# Allegro board FLASHLIGHT_REVA2-2.brd
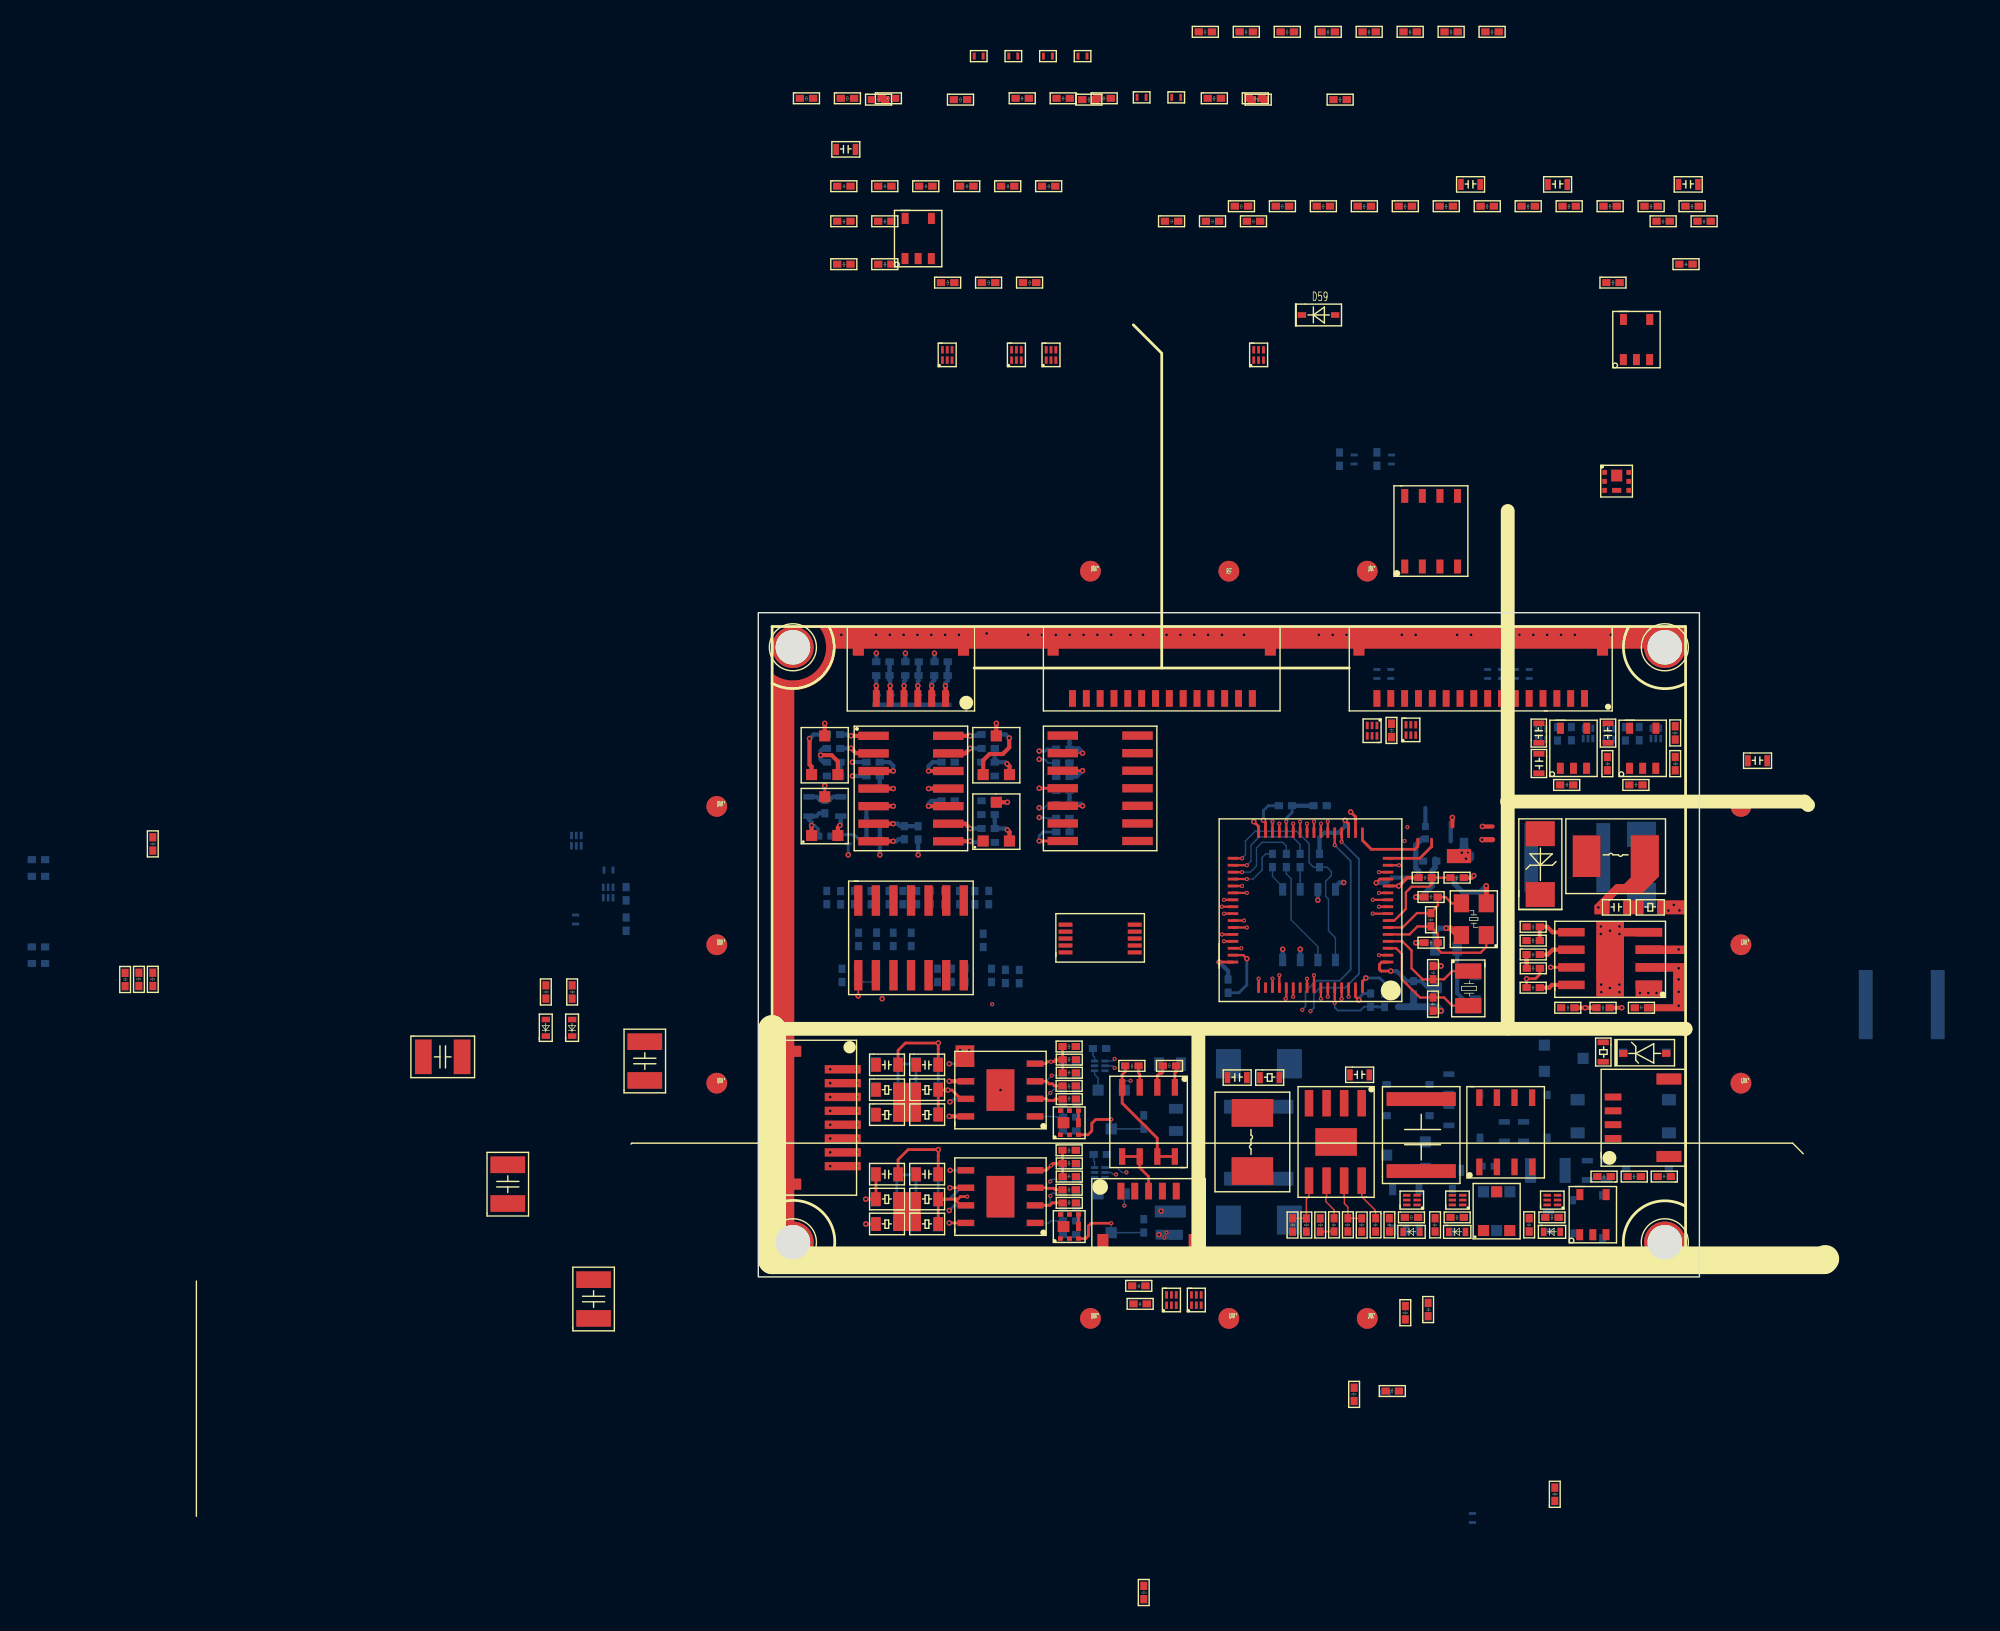
[diagram p0: board, top side]
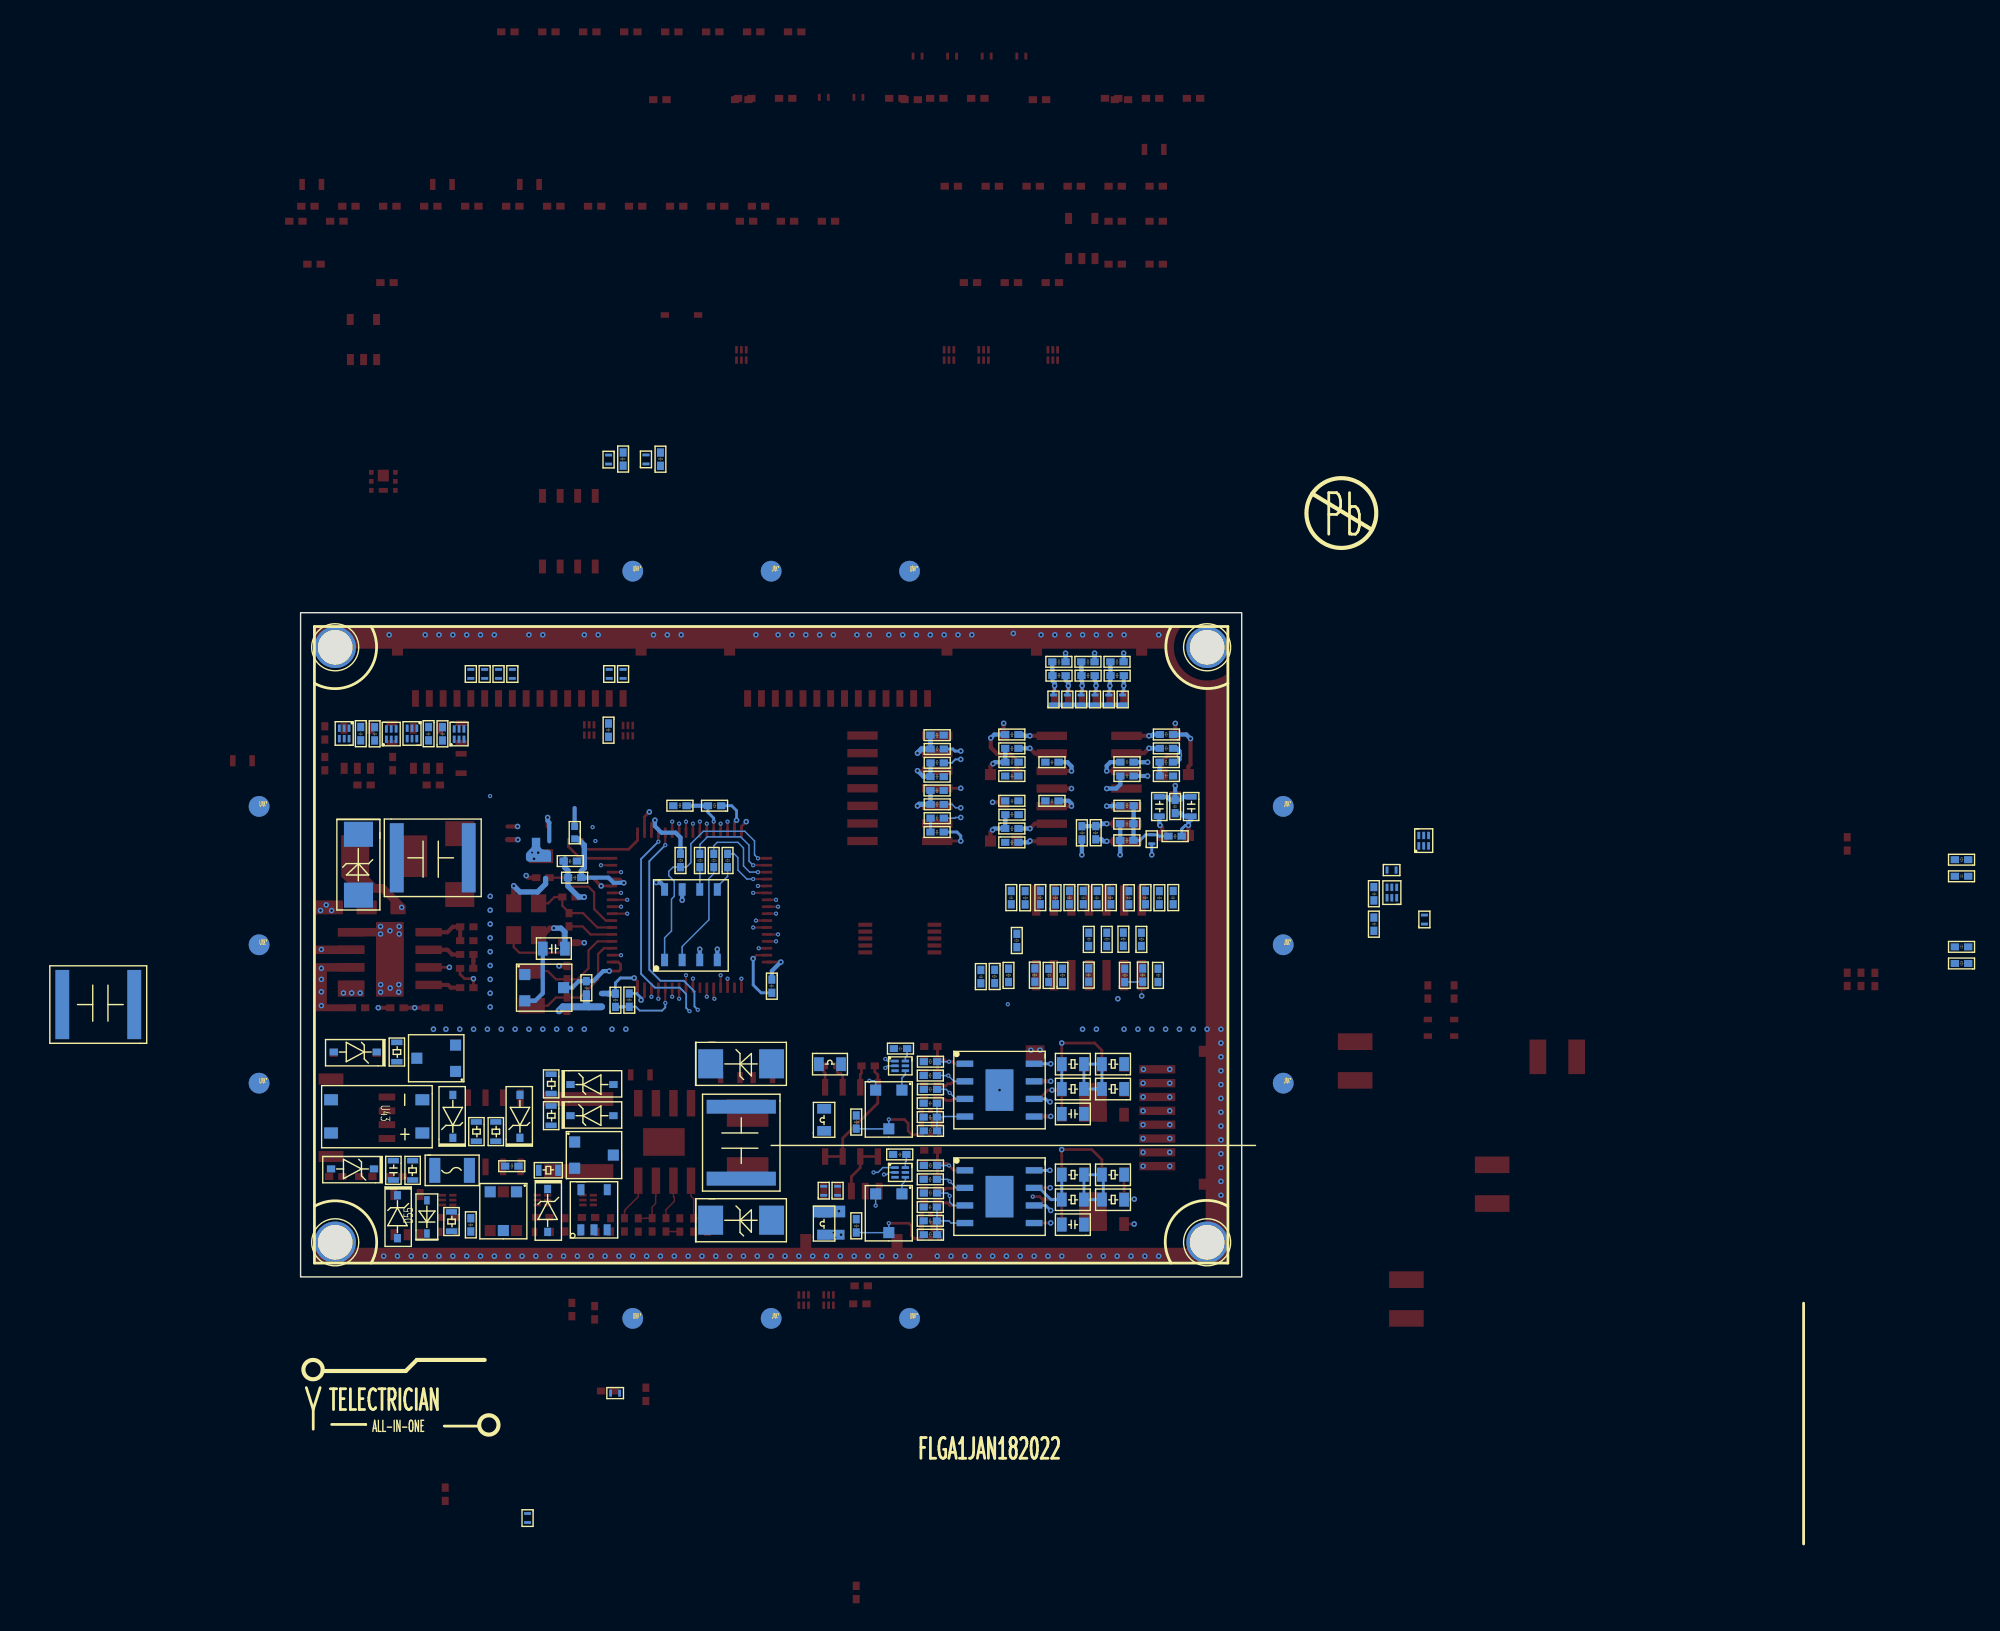
[diagram p1: board, bottom side, seen from below]

Outline 68 x 48 mm; copper layers: TOP, GND-2, SIGNAL-3, VCC-4, GND-5, SIGNAL-6, GND-7, BOTTOM. Coordinates in mm from the lower left corner of the outline.
Outline path: rectangle 0,0 68,48

## Design rules (mm)
constraint set DEFAULT: min track width 0.1

## Placement (name value [footprint] x y rotation side)
BT1  CR1220-3V  [C0805]  50.7 23.1 180 bottom
C5  0.1uF  [C0402]  7.8 36.45 0 bottom
C31  0.1uF  [C0402]  47.7 28.6 0 top
C32  22pF  [C0402]  49.1 27.7 180 top
C35  22pF  [C0402]  49.1 24.4 180 top
C36  22pF  [C0402]  49 21.5 90 top
C39  0.1uF  [C0402]  -45.5 21 90 top
C40  22pF  [C0402]  48.5 20.2 270 top
C44  0.1uF  [C0402]  22.96 15 180 top
C45  0.1uF  [C0402]  22.96 7.5 180 top
C46  10uF  [C1210]  -11.9 -3 90 top
C47  10uF  [C1210]  -8.2 14.2 90 top
C48  10uF  [C0805]  11.2 6.8 0 top
C55  10uF  [C0402]  17.1 35.95 180 bottom
C56  10uF  [C0402]  4.95 36.45 0 bottom
C57  0.1uF  [C0402]  57.5 38.76 90 bottom
C63  0.1uF  [C0402]  46 40 270 bottom
C64  0.1uF  [C0402]  59 39.74 270 bottom
C71  0.1uF  [C0402]  14.2 36.95 180 bottom
C75  0.1uF  [C0402]  63.9 39.74 270 bottom
C76  0.1uF  [C0402]  -9.8 27.2 90 bottom
C78  0.1uF  [C0402]  62.4 38.76 90 bottom
C80  0.1uF  [C0402]  -9.8 25 90 bottom
C81  10uF  [C0402]  49 29.8 180 bottom
C82  0.1uF  [C0402]  8.79 32.5 180 bottom
C84  0.1uF  [C0402]  48.69 28.6 180 bottom
C85  0.1uF  [C0402]  -52.5 29.2 0 bottom
C86  0.1uF  [C0402]  16.9 27.9 270 bottom
C87  0.1uF  [C0402]  11.7 27.9 270 bottom
C88  0.1uF  [C0402]  10.7 27.9 270 bottom
C89  0.1uF  [C0402]  5.2 27.9 270 bottom
C91  0.1uF  [C0402]  -52.5 24.1 0 bottom
C92  0.1uF  [C0402]  34.2 21.5 270 bottom
C93  0.1uF  [C0402]  47.1 20.41 90 bottom
C94  0.1uF  [C0402]  18.6 21.21 90 bottom
C95  0.1uF  [C0402]  11.3 22.3 270 bottom
C96  0.1uF  [C0402]  5.8 21.3 90 bottom
C98  0.1uF  [C0402]  46 39 90 top
C99  10uF  [C0805]  11.2 14.7 0 top
C102  10uF  [C1210]  -24.2 15.9 0 top
C103  10uF  [C1210]  -18.1 5.3 90 top
C104  0.1uF  [C0402]  13.7 21.3 90 bottom
C105  0.1uF  [C0402]  10.8 23.9 90 bottom
C107  1.5uF  [C0402]  65.95 7.5 180 top
C108  0.1uF  [C0402]  61.6 7.5 180 top
C109  0.1uF  [C0402]  45.35 4.25 270 top
C110  0.1uF  [C0402]  48.65 4.25 270 top
C111  0.1uF  [C0402]  48.65 -2.85 90 top
C112  0.1uF  [C0402]  55.45 4.25 270 top
C113  10uF  [C0603]  61.7 8.5 270 bottom
C114  0.1uF  [C0402]  64.3 19.7 180 top
C115  10nF  [C0603]  61.2 26.3 0 top
C116  47uF  [C2220]  80.02 19.68 0 bottom
C117  0.1uF  [C0402]  55.5 20.65 0 top
C118  5.6nF  [C0402]  55.5 23.05 0 top
C119  47uF  [C2220]  61.05 30.29 180 bottom
C120  4.7uF  [C0603]  50.66 78.55 0 top
C121  0.1uF  [C0402]  66.54 72.94 0 top
C122  10uF  [C0603]  66.39 78.55 0 top
C123  4.7uF  [C0603]  71.4 36.9 0 top
C124  0.1uF  [C0402]  63.9 35.8 180 top
C125  10uF  [C0603]  56.8 38.5 90 top
C126  10uF  [C0603]  5.53 81.08 0 top
C127  4.7uF  [C0603]  56.95 78.55 0 top
C128  0.1uF  [C0402]  5.69 76.04 0 top
C129  0.1uF  [C0402]  8.65 76.04 0 top
C130  10uF  [C0603]  61.8 38.5 90 top
C131  4.7uF  [C0603]  56 37.9 270 top
C132  0.1uF  [C0402]  58.9 35.8 180 top
C133  0.1uF  [C0402]  61.6 36.6 90 top
C134  0.1uF  [C0603]  42.65 14.2 0 top
C135  10nF  [C0603]  33.8 14 0 top
C136  47uF  [C2220]  47.9 7.65 90 top
C137  0.1uF  [C0402]  44.35 4.25 270 top
C138  47uF  [C2220]  36.16 12.3 270 bottom
C139  5.6nF  [C0402]  41.35 4.25 270 top
C140  10uF  [C0805]  11.2 12.4 0 bottom
C141  0.1uF  [C0402]  22.99 12.3 180 bottom
C142  10uF  [C0603]  4.06 34.79 270 bottom
C143  0.1uF  [C0402]  7.8 37.45 0 bottom
C147  10uF  [C0603]  6.36 34.79 270 bottom
C148  0.1uF  [C0402]  5.06 34.48 270 bottom
C149  10uF  [C0402]  17.1 34.15 180 bottom
C150  0.1uF  [C0402]  14.2 34.15 180 bottom
C153  0.1uF  [C0402]  29.37 76.04 0 top
C154  0.1uF  [C0402]  32.33 76.04 0 top
C155  0.1uF  [C0402]  35.29 76.04 0 top
C166  0.1uF  [C0402]  64.89 76.04 0 top
C167  0.1uF  [C0402]  67.85 76.04 0 top
C168  0.1uF  [C0402]  5.69 78.57 0 top
C169  0.1uF  [C0402]  8.65 78.57 0 top
C170  0.1uF  [C0402]  11.61 78.57 0 top
C171  0.1uF  [C0402]  14.57 78.57 0 top
C172  0.1uF  [C0402]  17.53 78.57 0 top
C173  0.1uF  [C0402]  20.49 78.57 0 top
C174  0.1uF  [C0402]  25.14 16.25 180 bottom
C175  0.1uF  [C0402]  25.2 8.6 180 bottom
C176  10uF  [C0805]  11.2 4.4 0 bottom
C177  0.1uF  [C0402]  22.99 4.8 180 bottom
C178  0.1uF  [C0402]  27 -0.9 0 top
C179  0.1uF  [C0402]  27.1 -2.2 0 top
C196  0.1uF  [C0402]  18.58 84.92 0 top
C197  0.1uF  [C0402]  21.54 84.92 0 top
C198  0.1uF  [C0402]  24.5 84.92 0 top
C199  10uF  [C0805]  8.3 6.8 0 top
C200  10uF  [C0805]  8.3 14.7 0 top
D10  BLUE  [LED0402]  -15.1 17.5 90 top
D11  BLUE  [LED0402]  -13.2 17.5 90 top
D15  ESD4.5V88D-C  [DFN-1006DN]  52.7 43.9 270 bottom
D21  ESD4.5V88D-C  [DFN-1006DN]  45.7 43.9 270 bottom
D22  ESD4.5V88D-C  [DFN-1006DN]  44.7 43.9 270 bottom
D23  ESD4.5V88D-C  [DFN-1006DN]  43.05 58.75 90 bottom
D24  ESD4.5V88D-C  [DFN-1006DN]  45.75 59.39 270 bottom
D25  ESD4.5V88D-C  [DFN-1006DN]  53.7 43.9 270 bottom
D26  ESD4.5V88D-C  [DFN-1006DN]  54.7 43.9 270 bottom
D28  ESD4.5V88D-C  [DFN-1006DN]  -10.5 29.4 180 bottom
D29  ESD4.5V88D-C  [DFN-1006DN]  55.7 43.9 270 bottom
D30  ESD4.5V88D-C  [DFN-1006DN]  -13.2 25.5 90 bottom
D32  ESD4.5V88D-C  [DFN-1006DN]  6.5 31.3 90 bottom
D34  ESD4.5V88D-C  [DFN-1006DN]  45.6 -8.4 180 bottom
D36  ESD4.5V88D-C  [DFN-1006DN]  51.6 -17.1 270 bottom
D38  BZT52C6V8  [SOD-123]  62.5 16.15 0 top
D41  BZT52C24  [SOD-123]  52.15 10.05 90 bottom
D42  BZT52C36V  [SOD-123]  57 10.05 90 bottom
D43  BZT52C4V7  [SOD-123]  50.15 6.35 270 bottom
D44  RED  [LED0402]  49.99 3 0 top
D45  BZT52C4V7  [SOD-123]  62.7 7.8 0 bottom
D49  BLUE  [LED0402]  46.7 3 0 top
D50  BZT52C24  [SOD-123]  48.5 11.65 180 bottom
D51  BZT52C4V7  [SOD-123]  48.5 13.9 180 bottom
D52  YELLOW  [LED0402]  56.84 3 0 top
D53  BZT52C4V7  [SOD-123]  62.5 16.25 0 bottom
D54  BZT52C4V7  [SOD-123]  61 5.9 270 bottom
D55  MBRX0560  [SOD-323]  58.2 2.9 90 bottom
D56  SS35  [DO-214AC]  65.22 32.11 270 bottom
D57  SS35  [DO-214AC]  38.5 14 180 bottom
D58  SMAJ6.0A  [DO-214AC]  57.9 27.5 90 top
D59  MBRX0560  [SOD-323]  39.04 68.84 0 top
D60  SMAJ13A  [DO-214AC]  38.5 2.7 180 bottom
D67  ESD4.5V88D-C  [DFN-1006DN]  15.6 88.22 0 top
D68  ESD4.5V88D-C  [DFN-1006DN]  18.1 88.22 0 top
D69  ESD4.5V88D-C  [DFN-1006DN]  20.6 88.22 0 top
D70  ESD4.5V88D-C  [DFN-1006DN]  23.1 88.22 0 top
D75  ESD4.5V88D-C  [DFN-1006DN]  29.2 5.9 90 bottom
D76  ESD4.5V88D-C  [DFN-1006DN]  30.2 5.9 90 bottom
D97  ESD4.5V88D-C  [DFN-1006DN]  27.37 85.24 0 top
D98  ESD4.5V88D-C  [DFN-1006DN]  29.87 85.24 0 top
D99  ESD4.5V88D-C  [DFN-1006DN]  8.6 41.4 90 bottom
D100  ESD4.5V88D-C  [DFN-1006DN]  9.6 41.4 90 bottom
D101  ESD4.5V88D-C  [DFN-1006DN]  11.6 41.4 90 bottom
D102  ESD4.5V88D-C  [DFN-1006DN]  10.6 41.4 90 bottom
D103  ESD4.5V88D-C  [DFN-1006DN]  13.6 41.4 90 bottom
D104  ESD4.5V88D-C  [DFN-1006DN]  12.6 41.4 90 bottom
F1  1AMP  [FUSE1206]  58.3 7.7 180 bottom
J2  Header1x16  [SMD-SH1D0-16P-HOR]  52.2 42.5 180 top
J5  Header1x4  [SMD-SH1D0-4P-HOR]  62.5 11.5 90 top
J7  Header1x6  [SMD-SH1D0-6P-HOR]  11.03 42.49 180 top
J10  Header1x8  [SMD-SH1D0-8P-HOR]  5.5 11.5 270 top
J12  Header1x5  [SMD-SH1D0-5P-HOR]  28.7 5.5 0 top
J13  Header1x14  [SMD-SH1D0-14P-HOR]  28.2 42.5 180 top
L4  BLM15BD182SN1D  [FB0402]  48.44 32.6 270 bottom
L6  10uH  [IND-5D7X5D2X1D8]  64.05 30.4 180 top
L7  10uH  [IND-5D7X5D2X1D8]  35.7 11.85 270 top
L8  1uH  [L0805]  29.55 10.35 90 bottom
L9  1uH  [L0805]  29.55 2.85 90 bottom
L10  1uH  [L0805]  30.75 14.75 180 bottom
NOREF  -  []  4.51 36.81 90 top
NOREF#2  -  []  23.43 5.66 90 top
NOREF#3  -  []  8.3 12.95 90 top
NOREF#4  -  []  51.05 29.66 90 top
NOREF#5  -  []  56 36.3 0 top
NOREF#6  -  []  21.55 6.44 0 top
NOREF#7  -  []  44.31 58.16 0 top
NOREF#8  -  []  11.2 8.05 0 top
NOREF#9  -  []  13.2 11.1 90 top
NOREF#10  -  []  10.17 44.06 90 top
NOREF#11  -  []  15.26 26.46 90 top
NOREF#12  -  []  53.61 76.98 90 top
NOREF#13  -  []  8.3 6.75 90 top
NOREF#14  -  []  47.1 38.69 90 top
NOREF#15  -  []  28.24 4.63 90 top
NOREF#16  -  []  21.53 12.46 90 top
NOREF#17  -  []  37.75 14 90 top
NOREF#18  -  []  55.99 38.5 90 top
NOREF#19  -  []  40.16 29.15 90 top
NOREF#20  -  []  51.43 28.46 90 top
NOREF#21  -  []  11.16 33.03 0 top
NOREF#22  -  []  21.07 31.76 90 top
NOREF#23  -  []  23.43 2.66 90 top
NOREF#24  -  []  58.75 6.1 0 top
NOREF#25  -  []  4.42 84.78 90 top
NOREF#26  -  []  26.65 -2.34 0 top
NOREF#27  -  []  12.74 71.46 0 top
NOREF#28  -  []  36.15 14.81 0 top
NOREF#29  -  []  10.6 73.59 90 top
NOREF#30  -  []  17.54 36.81 90 top
NOREF#31  -  []  15.26 28.34 0 top
NOREF#32  -  []  67.97 72.8 90 top
NOREF#33  -  []  67.04 6.72 90 top
NOREF#34  -  []  73 36.9 90 top
NOREF#35  -  []  65.86 38.37 90 top
NOREF#36  -  []  60.1 39.27 90 top
NOREF#37  -  []  11.2 4.95 90 top
NOREF#38  -  []  -51.07 23.46 90 top
NOREF#39  -  []  21.56 6.66 90 top
NOREF#40  -  []  -52.95 30.54 0 top
NOREF#41  -  []  60.81 71.46 0 top
NOREF#42  -  []  12.56 22.73 0 top
NOREF#43  -  []  60.89 6.9 0 top
NOREF#44  -  []  7.12 75.9 90 top
NOREF#45  -  []  8.3 14.75 0 top
NOREF#46  -  []  17.08 78.43 0 top
NOREF#47  -  []  35.4 14 90 top
NOREF#48  -  []  21.56 12.16 0 top
NOREF#49  -  []  46.36 -3.53 0 top
NOREF#50  -  []  21.56 11.16 0 top
NOREF#51  -  []  49.49 13.15 0 top
NOREF#52  -  []  8.3 4.95 90 top
NOREF#53  -  []  34.34 20.07 90 top
NOREF#54  -  []  -52.95 24.24 0 top
NOREF#55  -  []  48.77 76.98 0 top
NOREF#56  -  []  28.77 15.64 0 top
NOREF#57  -  []  11.2 3.15 0 top
NOREF#58  -  []  12.84 26.47 90 top
NOREF#59  -  []  66.32 75.9 90 top
NOREF#60  -  []  0 24 0 top
NOREF#61  -  []  21.92 78.43 90 top
NOREF#62  -  []  13.56 22.73 0 top
NOREF#63  -  []  28.53 -2.34 90 top
NOREF#64  -  []  8.3 15.95 0 top
NOREF#65  -  []  17.41 38.33 0 top
NOREF#66  -  []  33.89 84.78 90 top
NOREF#67  -  []  5.66 20.85 90 top
NOREF#68  -  []  12.06 26.47 0 top
NOREF#69  -  []  51.44 3.91 90 top
NOREF#70  -  []  62.49 9.38 0 top
NOREF#71  -  []  23.71 16.11 0 top
NOREF#72  -  []  34.84 75.9 0 top
NOREF#73  -  []  34.32 89.59 0 top
NOREF#74  -  []  56.4 38.45 90 top
NOREF#75  -  []  7.76 28.34 0 top
NOREF#76  -  []  23.43 13.16 90 top
NOREF#77  -  []  49.12 89.59 0 top
NOREF#78  -  []  21.52 5.91 0 top
NOREF#79  -  []  10.06 26.47 0 top
NOREF#80  -  []  11.2 6.75 0 top
NOREF#81  -  []  23.77 8.46 0 top
NOREF#82  -  []  21.56 11.16 90 top
NOREF#83  -  []  23.43 10.16 90 top
NOREF#84  -  []  43.62 40.31 90 top
NOREF#85  -  []  68.41 76.98 90 top
NOREF#86  -  []  69.28 75.9 90 top
NOREF#87  -  []  49.3 7.3 90 top
NOREF#88  -  []  11.2 12.35 0 top
NOREF#89  -  []  28.75 16 0 top
NOREF#90  -  []  39.89 76.98 0 top
NOREF#91  -  []  15.67 38.81 0 top
NOREF#92  -  []  -9.3 23.91 0 top
NOREF#93  -  []  31.36 89.59 0 top
NOREF#94  -  []  16.46 20.85 90 top
NOREF#95  -  []  12.27 44.06 0 top
NOREF#96  -  []  58.9 -17.29 90 top
NOREF#97  -  []  48.51 2.82 90 top
NOREF#98  -  []  41.85 3.78 0 top
NOREF#99  -  []  55.05 22.91 0 top
NOREF#100  -  []  33.97 76.98 0 top
NOREF#101  -  []  21.56 3.66 90 top
NOREF#102  -  []  53.68 6.83 90 top
NOREF#103  -  []  43.2 89.59 0 top
NOREF#104  -  []  -52.95 29.34 0 top
NOREF#105  -  []  -14.96 19.65 90 top
NOREF#106  -  []  61.52 40.05 90 top
NOREF#107  -  []  60.65 15.45 0 top
NOREF#108  -  []  47.67 24.54 0 top
NOREF#109  -  []  43.07 2.17 0 top
NOREF#110  -  []  44.25 14.2 90 top
NOREF#111  -  []  14.56 20.87 0 top
NOREF#112  -  []  -45.14 20.56 0 top
NOREF#113  -  []  10.94 31.16 90 top
NOREF#114  -  []  48.51 2.82 0 top
NOREF#115  -  []  51.8 6.83 0 top
NOREF#116  -  []  8.3 14.75 90 top
NOREF#117  -  []  36.76 31.03 0 top
NOREF#118  -  []  31.88 75.9 0 top
NOREF#119  -  []  21.56 6.66 0 top
NOREF#120  -  []  44.73 76.98 90 top
NOREF#121  -  []  25.93 84.78 90 top
NOREF#122  -  []  21.56 4.66 0 top
NOREF#123  -  []  53.96 89.59 90 top
NOREF#124  -  []  36.85 84.78 90 top
NOREF#125  -  []  57.47 35.94 0 top
NOREF#126  -  []  9.23 33.66 0 top
NOREF#127  -  []  15.7 71.46 0 top
NOREF#128  -  []  75.42 0 0 top
NOREF#129  -  []  21.55 3.44 0 top
NOREF#130  -  []  59.35 3.05 90 top
NOREF#131  -  []  49.17 29.66 0 top
NOREF#132  -  []  28.43 -1.04 90 top
NOREF#133  -  []  59.43 19.06 90 top
NOREF#134  -  []  17.46 20.77 0 top
NOREF#135  -  []  62.9 37.66 0 top
NOREF#136  -  []  21.53 7.81 90 top
NOREF#137  -  []  35.18 84.69 0 top
NOREF#138  -  []  -13.06 19.65 90 top
NOREF#139  -  []  22.94 36.76 90 top
NOREF#140  -  []  20.04 78.43 0 top
NOREF#141  -  []  3.87 31.46 0 top
NOREF#142  -  []  21.53 15.31 90 top
NOREF#143  -  []  13.2 14.7 90 top
NOREF#144  -  []  7.12 81.08 90 top
NOREF#145  -  []  11.2 14.15 0 top
NOREF#146  -  []  33.9 14 90 top
NOREF#147  -  []  62.43 27.51 90 top
NOREF#148  -  []  10.3 3.2 90 top
NOREF#149  -  []  36.72 75.9 90 top
NOREF#150  -  []  38.07 2.17 0 top
NOREF#151  -  []  11.84 26.47 90 top
NOREF#152  -  []  55.99 40.1 0 top
NOREF#153  -  []  49.55 3.91 0 top
NOREF#154  -  []  50.65 76.98 90 top
NOREF#155  -  []  8.2 78.43 0 top
NOREF#156  -  []  9.63 84.69 90 top
NOREF#157  -  []  15.55 84.69 90 top
NOREF#158  -  []  65.86 38.03 0 top
NOREF#159  -  []  43.73 3.78 90 top
NOREF#160  -  []  5.24 72.8 0 top
NOREF#161  -  []  13.56 20.85 90 top
NOREF#162  -  []  12.77 34.01 0 top
NOREF#163  -  []  40.16 31.03 0 top
NOREF#164  -  []  53.49 9.7 90 top
NOREF#165  -  []  61.85 2.9 90 top
NOREF#166  -  []  7.35 37.59 0 top
NOREF#167  -  []  11.2 4.45 0 top
NOREF#168  -  []  49.13 28.46 90 top
NOREF#169  -  []  46.16 89.59 0 top
NOREF#170  -  []  7.12 72.8 90 top
NOREF#171  -  []  48.36 22.93 0 top
NOREF#172  -  []  35.85 76.98 90 top
NOREF#173  -  []  20.54 71.46 90 top
NOREF#174  -  []  7.38 84.78 90 top
NOREF#175  -  []  21.53 5.74 0 top
NOREF#176  -  []  61.2 27.11 0 top
NOREF#177  -  []  14.14 43.06 90 top
NOREF#178  -  []  11.2 11.15 0 top
NOREF#179  -  []  26.55 -1.04 0 top
NOREF#180  -  []  58.55 78.55 90 top
NOREF#181  -  []  23.43 7.66 90 top
NOREF#182  -  []  21.53 14.36 90 top
NOREF#183  -  []  47.26 28.46 90 top
NOREF#184  -  []  49.14 21.05 90 top
NOREF#185  -  []  21.06 38.54 0 top
NOREF#186  -  []  45.08 89.59 90 top
NOREF#187  -  []  15.67 37.81 0 top
NOREF#188  -  []  7.36 32.36 90 top
NOREF#189  -  []  -51.07 22.26 90 top
NOREF#190  -  []  49.55 28.46 0 top
NOREF#191  -  []  37.76 29.15 90 top
NOREF#192  -  []  60.99 38.5 90 top
NOREF#193  -  []  26.05 14.86 0 top
NOREF#194  -  []  33.24 89.59 90 top
NOREF#195  -  []  60.17 6.86 90 top
NOREF#196  -  []  42.65 15.01 0 top
NOREF#197  -  []  55.05 23.91 0 top
NOREF#198  -  []  21.56 14.16 0 top
NOREF#199  -  []  60.61 76.98 0 top
NOREF#200  -  []  63.65 27.11 0 top
NOREF#201  -  []  21.06 34.54 0 top
NOREF#202  -  []  21.07 38.76 90 top
NOREF#203  -  []  11.16 78.43 0 top
NOREF#204  -  []  5.24 78.43 0 top
NOREF#205  -  []  5.56 28.34 0 top
NOREF#206  -  []  -51.07 28.56 90 top
NOREF#207  -  []  21.53 4.96 90 top
NOREF#208  -  []  15.67 32.01 0 top
NOREF#209  -  []  11.2 12.95 90 top
NOREF#210  -  []  10.66 23.45 90 top
NOREF#211  -  []  47.26 28.46 0 top
NOREF#212  -  []  45.25 6.45 0 top
NOREF#213  -  []  28.92 75.9 0 top
NOREF#214  -  []  41.53 33.66 90 top
NOREF#215  -  []  21.07 35.76 90 top
NOREF#216  -  []  20.01 84.78 90 top
NOREF#217  -  []  41.61 60.03 0 top
NOREF#218  -  []  62.47 35.94 0 top
NOREF#219  -  []  15.67 32.01 90 top
NOREF#220  -  []  56.57 76.98 90 top
NOREF#221  -  []  28.3 8.35 90 top
NOREF#222  -  []  6.56 26.47 0 top
NOREF#223  -  []  10.08 72.8 90 top
NOREF#224  -  [unnamed#3]  65.5 2.5 0 top
NOREF#225  -  []  9.84 26.47 90 top
NOREF#226  -  []  7.75 84.69 0 top
NOREF#227  -  []  -13.84 21.53 0 top
NOREF#228  -  []  14.94 26.47 90 top
NOREF#229  -  []  13.1 73.44 90 top
NOREF#230  -  []  21.53 15.14 0 top
NOREF#231  -  []  56.93 22.91 90 top
NOREF#232  -  []  65.25 26.3 90 top
NOREF#233  -  []  29.55 8.35 90 top
NOREF#234  -  []  47.25 28.46 0 top
NOREF#235  -  []  62.5 66.29 90 top
NOREF#236  -  []  59.53 76.98 90 top
NOREF#237  -  []  45.25 3.25 90 top
NOREF#238  -  []  18.24 20.77 90 top
NOREF#239  -  []  46.26 3.91 0 top
NOREF#240  -  []  22.94 37.76 90 top
NOREF#241  -  []  22.94 32.76 90 top
NOREF#242  -  []  9.36 25.33 0 top
NOREF#243  -  []  60.1 19.06 0 top
NOREF#244  -  []  38.76 31.03 0 top
NOREF#245  -  []  48.22 24.87 90 top
NOREF#246  -  []  47.75 3.4 90 top
NOREF#247  -  []  66.39 79.36 0 top
NOREF#248  -  []  62.49 76.98 90 top
NOREF#249  -  []  44.73 3.78 90 top
NOREF#250  -  []  29.2 -24.39 90 top
NOREF#251  -  []  48.36 18.77 0 top
NOREF#252  -  []  57.95 36.75 90 top
NOREF#253  -  []  49.49 10.85 90 top
NOREF#254  -  []  65 66.14 90 top
NOREF#255  -  []  13.2 6.8 90 top
NOREF#256  -  []  64.78 37.66 90 top
NOREF#257  -  []  15.66 33.79 0 top
NOREF#258  -  []  8.06 43.84 0 top
NOREF#259  -  []  6.38 38.81 90 top
NOREF#260  -  []  27.32 -24.39 0 top
NOREF#261  -  []  44.85 3.78 0 top
NOREF#262  -  []  53.49 9.7 0 top
NOREF#263  -  []  24.82 84.69 90 top
NOREF#264  -  []  46.96 21.84 0 top
NOREF#265  -  []  62.5 66.29 0 top
NOREF#266  -  []  6.38 37.81 90 top
NOREF#267  -  []  62.8 26.3 90 top
NOREF#268  -  []  4.42 33.05 0 top
NOREF#269  -  []  62.87 19.06 90 top
NOREF#270  -  []  12.26 43.84 0 top
NOREF#271  -  []  39.16 89.59 90 top
NOREF#272  -  []  13.04 78.43 90 top
NOREF#273  -  []  14.16 26.47 0 top
NOREF#274  -  []  10.08 78.43 90 top
NOREF#275  -  []  75.29 48 0 top
NOREF#276  -  []  33.76 75.9 90 top
NOREF#277  -  []  11.2 11.15 90 top
NOREF#278  -  []  46.36 -3.53 90 top
NOREF#279  -  []  66.53 76.98 0 top
NOREF#280  -  []  43.86 19.06 0 top
NOREF#281  -  []  9.84 26.47 90 top
NOREF#282  -  []  21.53 6.86 90 top
NOREF#283  -  []  44.86 20.93 0 top
NOREF#284  -  []  55.05 20.51 0 top
NOREF#285  -  []  51.1 50.8 90 top
NOREF#286  -  [unnamed#3]  2.5 2.5 0 top
NOREF#287  -  []  40.24 89.59 0 top
NOREF#288  -  []  13.2 5 90 top
NOREF#289  -  []  7.35 36.59 0 top
NOREF#290  -  []  10.3 12.9 90 top
NOREF#291  -  []  50.7 21.1 90 top
NOREF#292  -  []  57.35 39.8 0 top
NOREF#293  -  []  21.07 35.76 0 top
NOREF#294  -  []  18.46 22.64 0 top
NOREF#295  -  []  27.93 14.86 90 top
NOREF#296  -  []  -52.95 23.04 0 top
NOREF#297  -  []  11.2 12.95 0 top
NOREF#298  -  []  62.87 19.84 0 top
NOREF#299  -  []  58.22 39.27 0 top
NOREF#300  -  []  22.95 84.69 0 top
NOREF#301  -  []  21.06 33.54 0 top
NOREF#302  -  []  -7.42 26.11 90 top
NOREF#303  -  []  11.2 3.15 90 top
NOREF#304  -  []  6.76 20.87 0 top
NOREF#305  -  []  61.74 36.15 90 top
NOREF#306  -  []  23.71 16.11 90 top
NOREF#307  -  []  64.44 75.9 0 top
NOREF#308  -  []  40.07 2.17 0 top
NOREF#309  -  []  46.96 19.95 90 top
NOREF#310  -  []  -44.14 20.56 90 top
NOREF#311  -  []  65.86 38.37 0 top
NOREF#312  -  []  34 0 90 top
NOREF#313  -  []  13.06 28.34 0 top
NOREF#314  -  []  3.86 34.07 90 top
NOREF#315  -  []  7.54 20.87 90 top
NOREF#316  -  []  10.6 73.59 0 top
NOREF#317  -  []  23.4 13.41 90 top
NOREF#318  -  []  6.86 25.33 0 top
NOREF#319  -  []  7.12 78.43 90 top
NOREF#320  -  []  57.47 35.16 90 top
NOREF#321  -  []  -45.36 20.55 90 top
NOREF#322  -  []  37.28 89.59 0 top
NOREF#323  -  []  13.67 84.69 0 top
NOREF#324  -  []  18.13 84.78 0 top
NOREF#325  -  []  59.5 8.5 0 top
NOREF#326  -  []  11.2 14.75 0 top
NOREF#327  -  []  39.07 2.17 0 top
NOREF#328  -  []  32.01 84.78 0 top
NOREF#329  -  []  18.46 20.76 90 top
NOREF#330  -  []  67.4 75.9 0 top
NOREF#331  -  []  15.67 38.81 0 top
NOREF#332  -  []  8.07 44.06 90 top
NOREF#333  -  []  8.3 4.95 0 top
NOREF#334  -  []  10.17 44.06 0 top
NOREF#335  -  []  37.76 31.03 0 top
NOREF#336  -  []  5.5 84.78 0 top
NOREF#337  -  []  33.9 5.49 0 top
NOREF#338  -  []  14.12 78.43 0 top
NOREF#339  -  []  46.1 57 0 top
NOREF#340  -  []  45.81 76.98 0 top
NOREF#341  -  []  3.86 34.07 0 top
NOREF#342  -  []  56.41 3.91 0 top
NOREF#343  -  []  24.05 84.78 0 top
NOREF#344  -  []  21.55 15.94 0 top
NOREF#345  -  []  21.07 31.76 0 top
NOREF#346  -  []  56.09 2.82 90 top
NOREF#347  -  []  13.2 12.9 90 top
NOREF#348  -  []  41.95 2.17 90 top
NOREF#349  -  []  4.5 38.59 0 top
NOREF#350  -  []  10.66 20.87 0 top
NOREF#351  -  []  27.46 12.13 0 top
NOREF#352  -  []  55.31 2.82 90 top
NOREF#353  -  []  21.07 38.76 0 top
NOREF#354  -  []  8.3 4.45 0 top
NOREF#355  -  []  -51.07 29.76 90 top
NOREF#356  -  []  12.77 36.81 90 top
NOREF#357  -  []  16.46 22.73 0 top
NOREF#358  -  []  55.06 21.91 90 top
NOREF#359  -  []  55.31 2.82 0 top
NOREF#360  -  []  7.36 31.16 90 top
NOREF#361  -  []  54.69 76.98 0 top
NOREF#362  -  []  4.5 39.59 0 top
NOREF#363  -  []  8.46 84.78 0 top
NOREF#364  -  []  61.52 40.84 0 top
NOREF#365  -  []  33.9 16.79 0 top
NOREF#366  -  []  62.95 36.75 0 top
NOREF#367  -  []  10.08 75.9 90 top
NOREF#368  -  []  48.13 3.91 90 top
NOREF#369  -  []  3.87 31.46 90 top
NOREF#370  -  []  66.26 8.6 0 top
NOREF#371  -  []  30.8 75.9 90 top
NOREF#372  -  []  56.81 36.3 90 top
NOREF#373  -  []  37.15 34.44 0 top
NOREF#374  -  []  5.55 33.19 90 top
NOREF#375  -  []  29.55 0.85 90 top
NOREF#376  -  []  52.27 78.55 90 top
NOREF#377  -  []  54.89 9.7 0 top
NOREF#378  -  []  3.25 33.19 0 top
NOREF#379  -  []  44.86 19.05 90 top
NOREF#380  -  []  15.86 23.37 0 top
NOREF#381  -  []  51 89.59 90 top
NOREF#382  -  []  47.69 76.98 90 top
NOREF#383  -  []  39.95 2.17 90 top
NOREF#384  -  []  10.66 25.33 0 top
NOREF#385  -  []  47.67 27.84 0 top
NOREF#386  -  []  46.8 3.4 0 top
NOREF#387  -  []  8.07 44.06 0 top
NOREF#388  -  []  61.9 69.34 0 top
NOREF#389  -  []  23.43 15.16 90 top
NOREF#390  -  []  49.3 8.11 0 top
NOREF#391  -  []  22.97 84.78 90 top
NOREF#392  -  []  5.56 26.46 90 top
NOREF#393  -  []  7.34 26.47 90 top
NOREF#394  -  []  21.56 3.66 0 top
NOREF#395  -  []  -44.14 20.56 0 top
NOREF#396  -  []  -44.14 32.23 0 top
NOREF#397  -  []  60.31 6.9 90 top
NOREF#398  -  []  56.69 3.2 90 top
NOREF#399  -  []  55.11 32.1 0 top
NOREF#400  -  []  60.45 36.6 90 top
NOREF#401  -  []  46.47 -9.42 0 top
NOREF#402  -  []  5.24 75.9 0 top
NOREF#403  -  []  15.67 31.01 90 top
NOREF#404  -  []  15.34 20.87 90 top
NOREF#405  -  []  60.89 6.9 90 top
NOREF#406  -  []  33.9 2.7 90 top
NOREF#407  -  []  8.3 6.75 0 top
NOREF#408  -  []  15.67 31.01 0 top
NOREF#409  -  []  9.23 36.81 90 top
NOREF#410  -  []  7.36 31.16 0 top
NOREF#411  -  []  45.21 2.82 0 top
NOREF#412  -  []  36.93 76.98 0 top
NOREF#413  -  []  5.34 26.47 90 top
NOREF#414  -  []  23.77 8.46 90 top
NOREF#415  -  []  10.3 6.8 90 top
NOREF#416  -  []  21.55 8.44 0 top
NOREF#417  -  []  60.96 38.03 0 top
NOREF#418  -  []  61.46 15.45 90 top
NOREF#419  -  []  -46.14 22.43 0 top
NOREF#420  -  []  21.55 10.94 0 top
NOREF#421  -  []  21.07 34.76 0 top
NOREF#422  -  []  -9.3 26.11 0 top
NOREF#423  -  []  14.62 71.46 90 top
NOREF#424  -  []  56.95 79.36 0 top
NOREF#425  -  []  44.95 2.17 90 top
NOREF#426  -  []  49.49 13.15 90 top
NOREF#427  -  []  21.52 8.76 0 top
NOREF#428  -  []  8.06 20.85 90 top
NOREF#429  -  []  21.53 7.64 0 top
NOREF#430  -  []  12.77 36.81 0 top
NOREF#431  -  []  18.19 36.45 90 top
NOREF#432  -  []  33.8 14.81 0 top
NOREF#433  -  []  12.04 43.06 90 top
NOREF#434  -  []  55.11 27.5 90 top
NOREF#435  -  []  10 76.64 0 top
NOREF#436  -  []  60.99 40.1 0 top
NOREF#437  -  []  4.56 26.47 0 top
NOREF#438  -  []  16.64 23.37 90 top
NOREF#439  -  []  36.76 29.15 90 top
NOREF#440  -  []  10.34 84.78 90 top
NOREF#441  -  []  56.4 39.23 0 top
NOREF#442  -  []  48.79 -3.3 90 top
NOREF#443  -  []  15.66 37.59 0 top
NOREF#444  -  []  21.53 8.59 0 top
NOREF#445  -  []  45.21 2.82 90 top
NOREF#446  -  []  71.4 37.71 0 top
NOREF#447  -  []  18.66 71.46 0 top
NOREF#448  -  []  18.96 78.43 90 top
NOREF#449  -  []  37.06 84.69 90 top
NOREF#450  -  []  34.97 84.78 0 top
NOREF#451  -  []  15.67 37.81 90 top
NOREF#452  -  []  47.67 27.06 90 top
NOREF#453  -  []  33.56 20.07 0 top
NOREF#454  -  []  8.06 22.73 0 top
NOREF#455  -  []  60.64 15.45 0 top
NOREF#456  -  []  13.06 26.46 90 top
NOREF#457  -  []  15.67 34.01 0 top
NOREF#458  -  []  10.3 11.1 90 top
NOREF#459  -  []  21.09 84.78 0 top
NOREF#460  -  []  63.57 76.98 0 top
NOREF#461  -  []  40.95 2.17 90 top
NOREF#462  -  []  4.51 36.81 0 top
NOREF#463  -  []  3.25 33.19 90 top
NOREF#464  -  []  43.62 41.09 0 top
NOREF#465  -  []  15.67 34.01 90 top
NOREF#466  -  []  48.22 24.87 0 top
NOREF#467  -  []  67.99 78.55 90 top
NOREF#468  -  []  49.49 10.85 0 top
NOREF#469  -  []  12.77 34.01 90 top
NOREF#470  -  []  38.81 76.98 90 top
NOREF#471  -  []  10.84 26.47 90 top
NOREF#472  -  []  5.53 81.89 0 top
NOREF#473  -  []  42.98 84.69 90 top
NOREF#474  -  []  12.56 20.85 90 top
NOREF#475  -  []  39.03 33.66 90 top
NOREF#476  -  [unnamed#3]  2.5 45.5 0 top
NOREF#477  -  []  56.93 24.91 90 top
NOREF#478  -  []  48.36 18.77 90 top
NOREF#479  -  []  43.3 -8.47 0 top
NOREF#480  -  []  41.61 58.15 90 top
NOREF#481  -  []  7.76 26.46 90 top
NOREF#482  -  []  -5 53 0 top
NOREF#483  -  []  11.16 31.15 90 top
NOREF#484  -  []  61.98 19.06 90 top
NOREF#485  -  []  48.35 -9.42 90 top
NOREF#486  -  []  8.94 23.46 90 top
NOREF#487  -  []  60.64 15.45 90 top
NOREF#488  -  []  22.94 33.76 90 top
NOREF#489  -  []  27.46 2.75 90 top
NOREF#490  -  []  56.93 20.51 90 top
NOREF#491  -  []  21.56 4.66 90 top
NOREF#492  -  []  0 -7.51 0 top
NOREF#493  -  []  10.16 31.16 0 top
NOREF#494  -  []  8.3 14.15 0 top
NOREF#495  -  []  45.18 -8.47 90 top
NOREF#496  -  []  42.12 89.59 90 top
NOREF#497  -  []  68 -7.81 0 top
NOREF#498  -  []  55.06 22.69 0 top
NOREF#499  -  []  5.2 33.05 90 top
NOREF#500  -  []  8.2 72.8 0 top
NOREF#501  -  []  57.65 76.98 0 top
NOREF#502  -  []  17.54 33.01 90 top
NOREF#503  -  []  48.04 89.59 90 top
NOREF#504  -  []  9.36 23.45 90 top
NOREF#505  -  []  45.22 39.47 0 top
NOREF#506  -  []  21.06 37.54 0 top
NOREF#507  -  []  56.93 23.91 90 top
NOREF#508  -  []  16 78.43 90 top
NOREF#509  -  []  57.02 -17.29 0 top
NOREF#510  -  []  -43.36 30.35 90 top
NOREF#511  -  []  21.56 12.16 90 top
NOREF#512  -  []  8.3 12.35 0 top
NOREF#513  -  []  21.55 13.94 0 top
NOREF#514  -  []  11.2 14.75 90 top
NOREF#515  -  []  46.73 3.78 90 top
NOREF#516  -  []  51.73 76.98 0 top
NOREF#517  -  []  36.2 89.59 90 top
NOREF#518  -  []  7.35 34.44 0 top
NOREF#519  -  []  -45.14 20.56 90 top
NOREF#520  -  []  58.28 3.91 90 top
NOREF#521  -  []  41.77 76.98 90 top
NOREF#522  -  []  41.1 84.69 0 top
NOREF#523  -  []  63.27 7.5 90 top
NOREF#524  -  []  50.66 79.36 0 top
NOREF#525  -  []  11.06 26.47 0 top
NOREF#526  -  []  39.65 34.44 0 top
NOREF#527  -  []  -15.74 21.53 90 top
NOREF#528  -  []  49.45 21.1 90 top
NOREF#529  -  []  6.86 23.45 90 top
NOREF#530  -  []  21.52 16.26 0 top
NOREF#531  -  []  17.04 26.47 90 top
NOREF#532  -  []  8.16 23.46 0 top
NOREF#533  -  []  55.05 24.91 0 top
NOREF#534  -  []  21.52 13.41 0 top
NOREF#535  -  []  8.3 6.25 0 top
NOREF#536  -  []  23.4 16.26 90 top
NOREF#537  -  []  8.3 12.95 0 top
NOREF#538  -  []  45.09 58.16 90 top
NOREF#539  -  []  5.66 22.73 0 top
NOREF#540  -  []  38.76 29.15 90 top
NOREF#541  -  [unnamed#3]  65.5 45.5 0 top
NOREF#542  -  []  7.36 32.36 0 top
NOREF#543  -  []  66.64 36.15 90 top
NOREF#544  -  []  47.67 23.76 90 top
NOREF#545  -  []  -7.42 23.91 90 top
NOREF#546  -  []  11.2 15.95 0 top
NOREF#547  -  []  59.35 3.05 0 top
NOREF#548  -  []  21.56 14.16 90 top
NOREF#549  -  []  55.31 2.82 0 top
NOREF#550  -  []  48.01 -1.42 0 top
NOREF#551  -  []  9.23 35.81 90 top
NOREF#552  -  []  60.17 7.64 0 top
NOREF#553  -  []  21.53 16.09 0 top
NOREF#554  -  []  27.46 10.25 90 top
NOREF#555  -  []  62.43 27.51 0 top
NOREF#556  -  []  11.2 6.25 0 top
NOREF#557  -  []  5.55 33.19 0 top
NOREF#558  -  []  12.27 44.06 90 top
NOREF#559  -  []  -5 -5 90 top
NOREF#560  -  []  30.8 0.85 90 top
NOREF#561  -  []  42.85 3.78 0 top
NOREF#562  -  []  54.89 9.7 90 top
NOREF#563  -  []  57.55 19.06 0 top
NOREF#564  -  []  10.16 43.84 0 top
NOREF#565  -  []  62.7 71.46 90 top
NOREF#566  -  []  21.53 13.24 0 top
NOREF#567  -  []  23.4 8.76 90 top
NOREF#568  -  []  52.08 89.59 0 top
NOREF#569  -  []  44.64 19.06 90 top
NOREF#570  -  []  2.54 84.78 0 top
NOREF#571  -  []  10.3 5 90 top
NOREF#572  -  []  23.4 5.91 90 top
NOREF#573  -  []  13.2 3.2 90 top
NOREF#574  -  []  47.94 31.6 90 top
NOREF#575  -  []  28.77 14.86 90 top
NOREF#576  -  []  42.85 76.98 0 top
NOREF#577  -  []  57.95 36.75 0 top
NOREF#578  -  []  65.45 36.6 90 top
NOREF#579  -  []  62.47 35.16 90 top
NOREF#580  -  []  11.2 4.95 0 top
NOREF#581  -  []  62.35 39.8 0 top
NOREF#582  -  []  9.94 43.06 90 top
NOREF#583  -  []  11.44 20.87 90 top
NOREF#584  -  []  66.09 72.8 0 top
NOREF#585  -  []  8.3 8.05 0 top
NOREF#586  -  []  62.95 36.75 90 top
NOREF#587  -  []  10.3 14.7 90 top
NOREF#588  -  []  8.2 75.9 0 top
NOREF#589  -  []  65.45 76.98 90 top
NOREF#590  -  []  56.69 3.2 0 top
NOREF#591  -  []  17.58 71.46 90 top
NOREF#592  -  []  21.07 34.76 90 top
NOREF#593  -  []  16.26 26.47 0 top
NOREF#594  -  []  11.2 6.75 90 top
NOREF#595  -  []  28.75 14.75 90 top
Q1  S8550  [SOT-23-3]  4.8 37.7 0 top
Q2  S8550  [SOT-23-3]  17.2 37.7 0 top
Q5  BAT54CW  [SOT-323]  50.4 20.9 270 bottom
Q7  S8550  [SOT-23-3]  17.2 32.9 0 top
Q8  BAT54CW  [SOT-323]  25.5 12.1 0 bottom
Q9  BAT54CW  [SOT-323]  25.5 4.6 0 bottom
R17  10K-OHMS  [R0402]  -43.5 30.8 90 top
R18  10K-OHMS  [R0402]  50 28.6 0 top
R21  1Meg-OHMS  [R0402]  48.35 26.3 270 top
R23  2.2K-OHMS  [R0402]  -15.1 20.1 90 top
R24  2.2K-OHMS  [R0402]  -13.2 20.1 90 top
R26  10K-OHMS  [R0402]  -45 21.99 270 top
R27  10K-OHMS  [R0402]  -44 21.99 270 top
R32  1.62K-OHMS  [R0402]  46.3 -8 180 top
R34  16.2K  [R0402]  42.8 -8 270 top
R35  100K-OHMS  [R0402]  21.97 13.55 0 top
R37  100K-OHMS  [R0402]  22.96 13.1 180 top
R39  100K-OHMS  [R0402]  21.97 6.05 0 top
R42  100K-OHMS  [R0402]  22.96 5.6 180 top
R43  5.49K-OHMS  [R0402]  57.8 -16.2 90 top
R46  16.2K-OHMS  [R0402]  28.1 -23.3 90 top
R59  1.69K-OHMS  [R0402]  16.11 37.45 0 bottom
R61  2K-OHMS  [R0402]  17.1 38.95 180 bottom
R63  2K-OHMS  [R0402]  4.95 39.45 0 bottom
R65  10K-OHMS  [R0402]  44.95 59.59 270 bottom
R66  10K-OHMS  [R0402]  41.75 58.6 90 bottom
R72  1K-OHMS  [R0402]  4.95 38.45 0 bottom
R75  1K-OHMS  [R0402]  17.1 37.95 180 bottom
R76  0-OHMS  [R0402]  40.1 34.3 0 bottom
R77  DNP  [R0402]  37.6 34.3 0 bottom
R82  16.2K-OHMS  [R0402]  5.3 31.6 180 bottom
R83  8.25K-OHMS  [R0402]  8.79 31.3 180 bottom
R84  10K-OHMS  [R0402]  40.3 29.6 90 bottom
R85  33-OHMS  [R0402]  38.9 29.6 90 bottom
R86  33-OHMS  [R0402]  37.9 29.6 90 bottom
R87  33-OHMS  [R0402]  36.9 29.6 90 bottom
R89  10K-OHMS  [R0402]  -52.5 30.4 0 bottom
R90  10K-OHMS  [R0402]  22.5 31.9 180 bottom
R92  10K-OHMS  [R0402]  21.51 33.4 0 bottom
R96  10K-OHMS  [R0402]  21.51 34.4 0 bottom
R97  10K-OHMS  [R0402]  15.4 26.91 90 bottom
R98  10K-OHMS  [R0402]  14.8 27.9 270 bottom
R99  DNP  [R0402]  13.2 26.91 90 bottom
R100  10K-OHMS  [R0402]  12.7 27.9 270 bottom
R101  10K-OHMS  [R0402]  9.7 27.9 270 bottom
R102  DNP  [R0402]  7.9 26.91 90 bottom
R103  10K-OHMS  [R0402]  7.2 27.9 270 bottom
R104  10K-OHMS  [R0402]  5.7 26.91 90 bottom
R105  10K-OHMS  [R0402]  22.5 34.9 180 bottom
R109  10K-OHMS  [R0402]  21.51 37.4 0 bottom
R111  10K-OHMS  [R0402]  21.51 38.4 0 bottom
R112  10K-OHMS  [R0402]  22.5 35.9 180 bottom
R114  10K-OHMS  [R0402]  -52.5 22.9 0 bottom
R115  10K-OHMS  [R0402]  22.5 38.9 180 bottom
R116  10K-OHMS  [R0402]  18.1 22.2 270 bottom
R117  71.5K-OHMS  [R0402]  16.6 21.3 90 bottom
R118  10K-OHMS  [R0402]  16.5 24.8 270 bottom
R119  8.66K-OHMS  [R0402]  12.7 21.3 90 bottom
R120  8.66K-OHMS  [R0402]  9.5 23.9 90 bottom
R121  10K-OHMS  [R0402]  7 23.9 90 bottom
R122  71.5K-OHMS  [R0402]  8.2 21.3 90 bottom
R123  10K-OHMS  [R0402]  7.4 22.3 270 bottom
R126  DNP  [R0402]  45 19.5 90 bottom
R127  0-OHMS  [R0402]  44.5 20.49 270 bottom
R128  1.87K-OHMS  [R0402]  22.96 8.45 180 top
R129  1.87K-OHMS  [R0402]  22.96 15.95 180 top
R130  16.2K-OHMS  [R0402]  21.97 8.9 0 top
R131  DNP  [R0402]  22 8.3 0 bottom
R132  DNP  [R0402]  22 15.8 0 bottom
R133  16.2K-OHMS  [R0402]  21.97 16.4 0 top
R134  10K-OHMS  [R0402]  15.2 22.3 270 bottom
R135  10K-OHMS  [R0402]  8.8 24.89 270 bottom
R136  0.68-OHMS  [R0805]  11.2 5 0 top
R137  0.68-OHMS  [R0805]  11.2 12.9 0 top
R139  5.62K-OHMS  [R0603]  60.65 17.05 270 top
R141  23.7K-OHMS  [R0402]  62.8 7 0 top
R142  DNP  [R0402]  19.11 71.6 0 top
R143  2K-OHMS  [R0603]  55.7 11.3 270 bottom
R145  33.2K-OHMS  [R0603]  50.9 7.3 180 bottom
R146  2K  [R0402]  50.01 4.05 0 top
R147  2K-OHMS  [R0603]  59.5 6.9 90 bottom
R148  825-OHMS  [R0603]  54.3 11.3 270 bottom
R149  100K-OHMS  [R0402]  52.25 8.25 0 bottom
R151  100K-OHMS  [R0402]  55.95 4.25 270 bottom
R153  2K  [R0402]  46.7 4.05 0 top
R154  5.62K-OHMS  [R0603]  50.3 12.45 270 bottom
R156  24.9K-OHMS  [R0603]  50.3 14.75 270 bottom
R157  2K  [R0402]  56.85 4.05 0 top
R158  1.4K-OHMS  [R0603]  61.45 17.05 270 bottom
R160  24.9K-OHMS  [R0603]  57.5 4.8 270 bottom
R161  10-OHMS  [R0603]  63.65 26.3 0 top
R162  20K-OHMS  [R0402]  60.55 19.2 0 top
R163  33.2K  [R0402]  55.5 25.05 0 top
R164  5.62K  [R0402]  55.5 24.05 0 top
R165  2K-OHMS  [R0402]  58 19.2 0 top
R166  6.49K  [R0402]  56.49 22.55 180 top
R167  150K-OHMS  [R0402]  8.2 84.83 0 top
R168  47.5K  [R0402]  14.12 84.83 0 top
R169  150K-OHMS  [R0402]  66 39.8 270 top
R170  47.5K-OHMS  [R0402]  66.5 36.6 90 top
R171  10-OHMS  [R0603]  36.15 14 0 top
R172  DNP  [R0402]  42.35 4.25 270 top
R173  33.2K  [R0402]  38.85 3.26 90 top
R174  100K-OHMS  [R0402]  43.85 3.26 90 top
R175  2.37K  [R0402]  39.85 3.26 90 top
R176  6.49K  [R0402]  40.85 3.26 90 top
R177  10K  [R0402]  13.19 71.6 0 top
R178  10K  [R0402]  16.15 71.6 0 top
R180  3.4K-OHMS  [R0402]  10.61 43.7 0 bottom
R181  100K-OHMS  [R0402]  22 13.8 0 bottom
R183  100K-OHMS  [R0402]  22.99 14.3 180 bottom
R185  16.2K-OHMS  [R0402]  22 10.8 0 bottom
R186  1.87K-OHMS  [R0402]  22.99 11.3 180 bottom
R187  511-OHMS  [R0402]  11.6 44.2 180 bottom
R188  1.69K-OHMS  [R0402]  5.94 36.95 180 bottom
R189  3.4K-OHMS  [R0402]  8.51 43.7 0 bottom
R190  511-OHMS  [R0402]  9.5 44.2 180 bottom
R202  1.69K-OHMS  [R0402]  16.11 33.65 0 bottom
R203  1K-OHMS  [R0402]  17.1 32.15 180 bottom
R205  2K-OHMS  [R0402]  17.1 31.15 180 bottom
R207  10K-OHMS  [R0402]  52.53 89.73 0 top
R208  DNP  [R0402]  12.71 43.7 0 bottom
R209  10K-OHMS  [R0402]  49.57 89.73 0 top
R210  10K-OHMS  [R0402]  46.61 89.73 0 top
R211  10K-OHMS  [R0402]  43.65 89.73 0 top
R212  976-OHMS  [R0402]  13.7 44.2 180 bottom
R224  10K-OHMS  [R0402]  40.69 89.73 0 top
R226  10K-OHMS  [R0402]  37.73 89.73 0 top
R228  9.09K-OHMS  [R0402]  31.81 89.73 0 top
R229  10K-OHMS  [R0402]  61.27 71.6 0 top
R230  110K-OHMS  [R0402]  34.77 89.73 0 top
R238  10K-OHMS  [R0402]  35.63 84.83 0 top
R239  10K-OHMS  [R0402]  23.39 84.83 0 top
R240  100K-OHMS  [R0402]  27.6 3.2 90 bottom
R241  100K-OHMS  [R0402]  27.6 10.7 90 bottom
R242  10K-OHMS  [R0402]  8.65 72.94 0 top
R243  10K-OHMS  [R0402]  5.69 72.94 0 top
R244  10K-OHMS  [R0402]  7.8 34.3 0 bottom
R245  DNP  [R0402]  11.3 31.6 90 bottom
R246  10K-OHMS  [R0402]  10.8 32.59 270 bottom
R247  0-OHMS  [R0402]  46.5 -2.1 270 top
R248  100K-OHMS  [R0402]  41.55 84.83 0 top
R249  100K-OHMS  [R0402]  22 6.3 0 bottom
R250  100K-OHMS  [R0402]  22.99 6.8 180 bottom
R252  16.2K-OHMS  [R0402]  22 3.3 0 bottom
R253  1.87K-OHMS  [R0402]  22.99 3.8 180 bottom
R259  0.68-OHMS  [R0805]  8.3 5 0 top
R260  0.68-OHMS  [R0805]  8.3 3.2 0 top
R261  0.68-OHMS  [R0805]  11.2 3.2 0 top
R262  0.68-OHMS  [R0805]  11.2 11.1 0 top
R263  0.68-OHMS  [R0805]  8.3 12.9 0 top
R264  0.68-OHMS  [R0805]  8.3 11.1 0 top
R273  442-OHMS  [R0402]  64.02 77.12 0 top
R274  3.32K-OHMS  [R0402]  37.38 77.12 0 top
R275  100K-OHMS  [R0402]  26.5 15 0 top
R276  100K-OHMS  [R0402]  30.2 15.5 180 top
R285  10K-OHMS  [R0402]  66.98 77.12 0 top
R286  1.1K-OHMS  [R0402]  34.42 77.12 0 top
R287  1.74K-OHMS  [R0402]  49.22 77.12 0 top
R288  4.42K-OHMS  [R0402]  52.18 77.12 0 top
R289  22.1K-OHMS  [R0402]  58.1 77.12 0 top
R293  3.32K-OHMS  [R0402]  40.34 77.12 0 top
R294  10K-OHMS  [R0402]  2.99 84.92 0 top
R295  442-OHMS  [R0402]  46.26 77.12 0 top
R296  1.1K-OHMS  [R0402]  43.3 77.12 0 top
R297  1.74K-OHMS  [R0402]  61.06 77.12 0 top
R298  4.42K-OHMS  [R0402]  55.14 77.12 0 top
R299  10K-OHMS  [R0402]  5.95 84.92 0 top
R300  10K-OHMS  [R0402]  8.91 84.92 0 top
R301  DNP  [R0402]  32.46 84.92 0 top
R302  DNP  [R0402]  35.42 84.92 0 top
R303  0.68-OHMS  [R0805]  11.2 8 0 bottom
R304  0.68-OHMS  [R0805]  11.2 6.2 0 bottom
R305  0.68-OHMS  [R0805]  8.3 8 0 bottom
R306  0.68-OHMS  [R0805]  8.3 6.2 0 bottom
R307  0.68-OHMS  [R0805]  11.2 16 0 bottom
R308  0.68-OHMS  [R0805]  11.2 14.2 0 bottom
R309  0.68-OHMS  [R0805]  8.3 16 0 bottom
R310  0.68-OHMS  [R0805]  8.3 14.2 0 bottom
REF  -  [unnamed#2]  34 51 0 top
U17  GD32F303RGT6  [LQFP64]  39.9 26.5 90 top
U18  SGM8968-4XS14G/TR  [SOIC-14]  22 31.5 90 top
U19  SGM58031XMS10G/TR  [MSOP-10]  22.2 23.45 90 top
U20  SGM8968-4XS14G/TR  [SOIC-14]  7.23 27.2 0 top
U22  AS4950  [SOP8-PP]  15 11.6 90 top
U23  AS4950  [SOP8-PP]  15 3.9 90 top
U28  SGM7SZ08YXDM6G/TR  [XTDFN-1X1-6L]  59.6 38.9 0 bottom
U29  SGM7SZ08YXDM6G/TR  [XTDFN-1X1-6L]  46.8 39.9 0 top
U30  SGM7SZ08YXDM6G/TR  [XTDFN-1X1-6L]  44.7 39.1 180 top
U36  SGM7SZ08YXDM6G/TR  [XTDFN-1X1-6L]  56.9 39.6 180 bottom
U37  SGM7SZ08YXDM6G/TR  [XTDFN-1X1-6L]  64.5 38.9 0 bottom
U38  SGM7SZ08YXDM6G/TR  [XTDFN-1X1-6L]  -11.2 27.4 0 bottom
U40  SGM7SZ08YXDM6G/TR  [XTDFN-1X1-6L]  61.8 39.6 180 bottom
U41  SGM7SZ08YXDM6G/TR  [XTDFN-1X1-6L]  -12.8 31.9 180 bottom
U42  GD25Q40ETIG  [SOP8-150MIL]  41.7 28 180 bottom
U43  KMB26S  [TO-269AA]  59.2 12.8 270 bottom
U44  SGM7SZ08YXDM6G/TR  [XTDFN-1X1-6L]  50.15 5.2 90 top
U45  SGM7SZ14  [SOT-23-5]  60.3 4.5 0 top
U46  NCE603S  [SOP-8]  52.1 12.95 0 top
U48  SGM7SZ08YXDM6G/TR  [XTDFN-1X1-6L]  46.85 5.2 90 top
U50  SGM7SZ08YXDM6G/TR  [XTDFN-1X1-6L]  57 5.2 90 top
U51  NCE60P04Y  [SOT-23-3L]  53.35 4.75 0 bottom
U52  NCE60P04Y  [SOT-23-3L]  46.8 8.8 270 bottom
U53  NCE60P04Y  [SOT-23-3L]  58.2 15.8 90 bottom
U54  NCE6003Y  [SOT-23-3L]  53.35 4.75 0 top
U55  SGM7SZ14  [SOT-23-5]  46.8 4.85 180 bottom
U56  SGM6230  [SOIC-8-EPAD]  58.75 21.1 90 top
U57  SGM2028-ADJ  [SOT-23-5]  11.55 75.04 0 top
U58  SGM2028-ADJ  [SOT-23-5]  58.9 38.2 0 top
U59  SGM2028-3.3  [SOT-23-5]  63.45 67.74 0 top
U60  SGM2028-3.3  [SOT-23-5]  63.9 38.2 0 top
U61  SGM6230  [SOIC-8-EPAD]  43.6 6.95 180 top
U62  AS4950  [SOP8-PP]  15 15.4 270 bottom
U64  TPR33XX-S3TR  [SOT-23-3]  4.8 33.3 0 top
U68  SGM8968-4  [SOIC-14]  13.73 39.1 270 top
U76  SGM7SZ08YXDM6G/TR  [XTDFN-1X1-6L]  20.8 67 0 top
U77  SGM7SZ08YXDM6G/TR  [XTDFN-1X1-6L]  18.3 67 0 top
U78  NCE40P06J  [DFN2X2-6L]  23.5 2.6 90 top
U79  NCE40P06J  [DFN2X2-6L]  23.5 10.1 90 top
U80  SGM7SZ08YXDM6G/TR  [XTDFN-1X1-6L]  35.8 67 0 top
U81  SGM7SZ08YXDM6G/TR  [XTDFN-1X1-6L]  13.3 67 0 top
U82  SGM7SZ08YXDM6G/TR  [XTDFN-1X1-6L]  24.3 15.6 270 bottom
U83  SGM7SZ08YXDM6G/TR  [XTDFN-1X1-6L]  24.3 7.9 270 bottom
U84  NCE3013J  [DFN2X2-6L]  60.98 56.47 0 top
U85  AS4950  [SOP8-PP]  15 7.7 270 bottom
U86  SGM7SZ08YXDM6G/TR  [XTDFN-1X1-6L]  29.5 -1.3 0 top
U87  SGM7SZ08YXDM6G/TR  [XTDFN-1X1-6L]  31.3 -1.3 0 top
U90  NCE603S  [SOP-8]  30.1 8.7 180 top
U91  SGM8968-2  [SOIC-8]  48.6 53.9 0 top
UNK*  -  [unnamed#2]  44 51 0 top
UNK*#2  -  [unnamed#2]  -3 14 0 top
UNK*#3  -  [unnamed#2]  71 34 0 top
UNK*#4  -  [unnamed#2]  24 -3 0 top
UNK*#5  -  [unnamed#2]  24 51 0 top
UNK*#6  -  [unnamed#2]  44 -3 0 top
UNK*#7  -  [unnamed#2]  -3 34 0 top
UNK*#8  -  [unnamed#2]  -3 24 0 top
UNK*#9  -  [unnamed#2]  71 14 0 top
UNK*#10  -  [unnamed#2]  34 -3 0 top
UNK*#11  -  [unnamed#2]  71 24 0 top
UNK*#12  -  [unnamed#2]  24 51 180 bottom
UNK*#13  -  [unnamed#2]  71 24 180 bottom
UNK*#14  -  [unnamed#2]  71 34 180 bottom
UNK*#15  -  [unnamed#2]  -3 34 180 bottom
UNK*#16  -  [unnamed#2]  44 51 180 bottom
UNK*#17  -  [unnamed#2]  -3 24 180 bottom
UNK*#18  -  [unnamed#2]  24 -3 180 bottom
UNK*#19  -  [unnamed#2]  71 14 180 bottom
UNK*#20  -  [unnamed#2]  34 51 180 bottom
UNK*#21  -  [unnamed#2]  44 -3 180 bottom
UNK*#22  -  [unnamed#2]  -3 14 180 bottom
UNK*#23  -  [unnamed#2]  34 -3 180 bottom
Y1  8MHz  [CRY-SMD-3D2X2D5MM-4P]  50.8 24.7 90 top
Y2  32.768KHz  [CRY-SMD-3D2X1D5MM-2P]  51.3 22.1 270 top

## Library data of the parts
BT1 = BATTERY
C5 C31 C32 C35 C36 C39 C40 C44-C48 C55-C57 C63 C64 C71 C75 C76 C78 C80-C82 C84-C89 C91-C96 C98 C99 C102-C105 C107-C143 C147-C150 C153-C155 C166-C179 C196-C200 = CAP NP
D10 D11 D44 D49 D52 = LED
D15 D21-D26 D28-D30 D32 D34 D36 D67-D70 D75 D76 D97-D104 = DIODE TS BI-DIR
D38 D41-D43 D45 D50 D51 D53 D54 D56 D57 = DIODE ZENER_0
D55 D59 = DIODE
D58 D60 = DIODE TVS_0
F1 = FUSE
J2 = Header1x16_0
J5 = Header1x4_0
J7 = Header1x6_0
J10 = Header1x8
J12 = Header1x5
J13 = Header1x14
L4 = BEAD
L6-L10 = INDUCTOR
Q1 Q2 Q7 = 2N2800_1
Q5 Q8 Q9 = BAT54CW_0
R17 R18 R21 R23 R24 R26 R27 R32 R34 R35 R37 R39 R42 R43 R46 R59 R61 R63 R65 R66 R72 R75-R77 R82-R87 R89 R90 R92 R96-R105 R109 R111 R112 R114-R123 R126-R137 R139 R141-R143 R145-R149 R151 R153 R154 R156-R158 R160-R178 R180 R181 R183 R185-R190 R202 R203 R205 R207-R212 R224 R226 R228-R230 R238-R250 R252 R253 R259-R264 R273-R276 R285-R289 R293-R310 = R
U17 = GD32F303RE
U18 U20 U68 = SGM8968-4
U19 = SGM58031
U22 U23 U62 U85 = AS4950
U28-U30 U36-U38 U40 U41 U44 U48 U50 U76 U77 U80-U83 U86 U87 = SGM7SZ08YXDM6G/TR_0
U42 = GD25Q40E
U43 = KMB26S
U45 U55 = SGM7SZ14_0
U46 = NCE603S_3
U51-U53 = NCE60P04Y
U54 = NCE6003Y
U56 U61 = SGM6230
U57-U60 = SGM2028
U64 = TPR33XX-S3TR
U78 U79 = NCE40P06J
U84 = NCE3013J
U90 = NCE603S
U91 = SGM8968-2
Y1 = CRYSTAL_1
Y2 = CRYSTAL

## Footprints (pads in the part's own frame, mm; a bottom-side part is the same pattern mirrored in y, then rotated)
C0402
  rect 0.6x0.5 smd: 1(0.01,0.25) 2(0.97,0.25)
C0603
  rect 0.4x0.8 smd: 1(0.1,0.4) 2(1.5,0.4)
C0805
  rect 0.7x1 smd: 1(0.2,0.62) 2(1.8,0.62)
C1210
  rect 1.2x2.5 smd: 1(0,0) 2(2.8,0)
C2220
  rect 1x5 smd: 1(0,0) 2(5.2,0)
CRY-SMD-3D2X1D5MM-2P
  rect 1.1x1.9 smd: 1(0,0) 2(2.5,0)
CRY-SMD-3D2X2D5MM-4P
  rect 1.3x1.1 smd: 1(0,-1.8) 2(2.3,-1.8) 3(2.3,0) 4(0,0)
DFN2X2-6L
  rect 0.326x0.35 smd: 1(0.17,1.67) 2(0.17,1.02) 3(0.17,0.37) 4(1.91,0.37) 5(1.91,1.02) 6(1.91,1.67)
  rect 0.8x0.85 smd: D(1.04,1.44)
  rect 0.66x0.35 smd: S(1.04,0.37)
DFN-1006DN
  rect 0.2x0.5 smd: 1(0,0) 2(0.65,0)
DO-214AC
  rect 1.8x2.1 smd: 1(0.13,1.4) 2(4.53,1.4)
FB0402
  rect 0.5x0.5 smd: 1(0.05,0.24) 2(0.95,0.24)
FUSE1206
  rect 0.8x1.8 smd: 1(0,0) 2(2.5,0)
IND-5D7X5D2X1D8
  rect 2x3 smd: 1(0,0) 2(4.2,0)
L0805
  rect 0.7x1 smd: 1(0.2,0.62) 2(1.8,0.62)
LED0402
  rect 0.4x0.6 smd: 1(-0.1,0.25) 2(1.1,0.25)
LQFP64
  rect 0.2x0.75 smd: 1(-3.75,-5.6) 2(-3.25,-5.6) 3(-2.75,-5.6) 4(-2.25,-5.6) 5(-1.75,-5.6) 6(-1.25,-5.6) 7(-0.75,-5.6) 8(-0.25,-5.6) 9(0.25,-5.6) 10(0.75,-5.6) 11(1.25,-5.6) 12(1.75,-5.6) 13(2.25,-5.6) 14(2.75,-5.6) 15(3.25,-5.6) 16(3.75,-5.6) 33(3.75,5.6) 34(3.25,5.6) 35(2.75,5.6) 36(2.25,5.6) 37(1.75,5.6) 38(1.25,5.6) 39(0.75,5.6) 40(0.25,5.6) 41(-0.25,5.6) 42(-0.75,5.6) 43(-1.25,5.6) 44(-1.75,5.6) 45(-2.25,5.6) 46(-2.75,5.6) 47(-3.25,5.6) 48(-3.75,5.6)
  rect 0.75x0.2 smd: 17(5.6,-3.75) 18(5.6,-3.25) 19(5.6,-2.75) 20(5.6,-2.25) 21(5.6,-1.75) 22(5.6,-1.25) 23(5.6,-0.75) 24(5.6,-0.25) 25(5.6,0.25) 26(5.6,0.75) 27(5.6,1.25) 28(5.6,1.75) 29(5.6,2.25) 30(5.6,2.75) 31(5.6,3.25) 32(5.6,3.75) 49(-5.6,3.75) 50(-5.6,3.25) 51(-5.6,2.75) 52(-5.6,2.25) 53(-5.6,1.75) 54(-5.6,1.25) 55(-5.6,0.75) 56(-5.6,0.25) 57(-5.6,-0.25) 58(-5.6,-0.75) 59(-5.6,-1.25) 60(-5.6,-1.75) 61(-5.6,-2.25) 62(-5.6,-2.75) 63(-5.6,-3.25) 64(-5.6,-3.75)
MSOP-10
  rect 0.3x1 smd: 1(0,-5) 2(0.5,-5) 3(1,-5) 4(1.5,-5) 5(2,-5) 6(2,0) 7(1.5,0) 8(1,0) 9(0.5,0) 10(0,0)
R0402
  rect 0.6x0.5 smd: 1(0.01,0.25) 2(0.97,0.25)
R0603
  rect 0.4x0.8 smd: 1(0.1,0.4) 2(1.5,0.4)
R0805
  rect 0.7x1 smd: 1(0.2,0.62) 2(1.8,0.62)
SMD-SH1D0-4P-HOR
  rect 0.5x1.2 smd: 1(-1.5,0.74) 2(-0.5,0.74) 3(0.5,0.74) 4(1.5,0.74)
  rect 0.8x1.8 smd: 5(2.8,-3.3) 6(-2.8,-3.3)
SMD-SH1D0-5P-HOR
  rect 0.5x1.2 smd: 1(-2.5,0.7) 2(-1.5,0.7) 3(-0.5,0.7) 4(0.5,0.7) 5(1.5,0.7)
  rect 0.8x1.8 smd: 6(2.8,-3.3) 7(-3.8,-3.3)
SMD-SH1D0-6P-HOR
  rect 0.5x1.2 smd: 1(-2.5,0.7) 2(-1.5,0.7) 3(-0.5,0.7) 4(0.5,0.7) 5(1.5,0.7) 6(2.5,0.7)
  rect 0.8x1.8 smd: 7(3.8,-3.3) 8(-3.8,-3.3)
SMD-SH1D0-8P-HOR
  rect 0.5x1.2 smd: 1(-3.5,0.7) 2(-2.5,0.7) 3(-1.5,0.7) 4(-0.5,0.7) 5(0.5,0.7) 6(1.5,0.7) 7(2.5,0.7) 8(3.5,0.7)
  rect 0.8x1.8 smd: 9(4.8,-3.3) 10(-4.8,-3.3)
SMD-SH1D0-14P-HOR
  rect 0.5x1.2 smd: 1(-7.5,0.7) 2(-6.5,0.7) 3(-5.5,0.7) 4(-4.5,0.7) 5(-3.5,0.7) 6(-2.5,0.7) 7(-1.5,0.7) 8(-0.5,0.7) 9(0.5,0.7) 10(1.5,0.7) 11(2.5,0.7) 12(3.5,0.7) 13(4.5,0.7) 14(5.5,0.7)
  rect 0.8x1.8 smd: 15(6.9,-3.3) 16(-8.8,-3.3)
SMD-SH1D0-16P-HOR
  rect 0.5x1.2 smd: 1(-7.5,0.7) 2(-6.5,0.7) 3(-5.5,0.7) 4(-4.5,0.7) 5(-3.5,0.7) 6(-2.5,0.7) 7(-1.5,0.7) 8(-0.5,0.7) 9(0.5,0.7) 10(1.5,0.7) 11(2.5,0.7) 12(3.5,0.7) 13(4.5,0.7) 14(5.5,0.7) 15(6.5,0.7) 16(7.5,0.7)
  rect 0.8x1.8 smd: 17(8.8,-3.3) 18(-8.8,-3.3)
SOD-123
  rect 0.6x0.5 smd: 1(0,0) 2(3.1,0)
SOD-323
  rect 0.6x0.4 smd: 1(0.235,0.673) 2(2.635,0.673)
SOIC-8
  rect 0.5x1 smd: 1(-1.89,-2.56) 2(-0.62,-2.56) 3(0.65,-2.56) 4(1.92,-2.56) 5(1.92,2.54) 6(0.65,2.54) 7(-0.62,2.54) 8(-1.89,2.54)
SOIC-8-EPAD
  rect 0.61x1.91 smd: 1(0,-5.6) 2(1.27,-5.6) 3(2.54,-5.6) 4(3.81,-5.6) 5(3.81,0) 6(2.54,0) 7(1.27,0) 8(0,0)
  rect 3x2 smd: 9(1.85,-2.8)
SOIC-14
  rect 0.6x2.2 smd: 1(0,-5.4) 2(1.27,-5.4) 3(2.54,-5.4) 4(3.81,-5.4) 5(5.08,-5.4) 6(6.35,-5.4) 7(7.62,-5.4) 8(7.62,0) 9(6.35,0) 10(5.08,0) 11(3.81,0) 12(2.54,0) 13(1.27,0) 14(0,0)
SOP8-150MIL
  rect 0.5x0.9 smd: 1(0,-5.1) 2(1.27,-5.1) 3(2.54,-5.1) 4(3.81,-5.1) 5(3.81,0) 6(2.54,0) 7(1.27,0) 8(0,0)
SOP8-PP
  rect 0.45x1.2 smd: 1(0,-5) 2(1.27,-5) 3(2.54,-5) 4(3.81,-5) 5(3.81,0) 6(2.54,0) 7(1.27,0) 8(0,0)
  rect 3x2 smd: 9(1.9,-2.5)
SOP-8
  rect 0.45x1.2 smd: 1(0,-5) 2(1.27,-5) 3(2.54,-5) 4(3.81,-5) 5(3.81,0) 6(2.54,0) 7(1.27,0) 8(0,0)
SOT-23-3
  rect 0.8x0.8 smd: 1(-0.95,-1.4) 2(0.95,-1.4) 3(0,1.4)
SOT-23-3L
  rect 0.8x0.8 smd: 1(-0.95,-1.4) 2(0.95,-1.4) 3(0,1.4)
SOT-23-5
  rect 0.5x0.8 smd: 1(-0.95,-1.45) 2(0,-1.45) 3(0.95,-1.45) 4(0.96,1.45) 5(-0.94,1.45)
SOT-323
  rect 0.8x0.8 smd: 1(-0.95,-1.4) 2(0.95,-1.4) 3(0,1.4)
TO-269AA
  rect 0.8x1 smd: 1(0,-6.6) 2(2.4,-6.6) 3(2.4,0) 4(0,0)
unnamed#2
  round 1.5 smd: (0,0)
unnamed#3
  round 3 hole 2.5 unplated: (0,0)
XTDFN-1X1-6L
  rect 0.2x0.53 smd: 1(0,-0.75) 2(0.35,-0.75) 3(0.7,-0.75) 4(0.7,0) 5(0.35,0) 6(0,0)

## Nets
12V_PWR_ON: R247.2 U17.2
GND: BT1.2(-) C5.1 C31.1 C32.2 C35.2 C36.2 C39.1 C40.2 C44.1 C45.1 C46.2 C47.2 C48.1 C55.1 C56.1 C57.1 C63.1 C64.2 C71.1 C75.2 C76.2 C78.1 C80.1 C81.1 C82.1 C84.1 C85.1 C86.1 C87.1 C88.1 C89.1 C91.1 C92.2 C93.1 C94.1 C95.2 C96.1 C98.2 C99.1 C102.2 C103.2 C104.1 C105.1 C107.1 C108.1 C109.2 C110.2 C111.2 C112.2 C113.2 C114.2 C116.1 C117.1 C119.1 C120.1 C121.1 C122.1 C123.1 C124.1 C125.1 C126.1 C127.1 C128.1 C129.1 C130.1 C131.1 C132.1 C133.1 C134.2 C136.1 C137.2 C138.1 C140.1 C141.1 C142.1 C143.1 C147.1 C148.1 C149.1 C150.1 C153.1 C154.1 C155.1 C166.2 C167.1 C168.2 C169.1 C170.2 C171.1 C172.2 C173.1 C174.1 C175.1 C176.1 C177.1 C178.1 C179.2 C196.1 C197.1 C198.2 C199.1 C200.1 D15.1 D21.1 D22.1 D23.2 D24.2 D25.1 D26.1 D28.1 D29.1 D30.1 D32.1 D34.1 D36.1 D38.2 D42.2 D43.2 D44.1(CATHODE) D45.2 D49.1(CATHODE) D50.2 D51.2 D52.1(CATHODE) D53.2 D56.2 D57.2 D58.2 D60.2 D67.2 D68.2 D69.2 D70.2 D75.1 D76.1 D97.1 D98.1 D99.1 D100.1 D101.1 D102.1 D103.1 D104.1 J2.2 J2.4 J2.9 J2.17 J2.18 J5.5 J5.6 J7.7 J7.8 J10.9 J10.10 J12.1 J12.2 J12.6 J12.7 J13.1 J13.15 J13.16 R32.1 R35.2 R37.1 R39.2 R42.1 R43.2 R77.1 R83.1 R99.2 R102.2 R105.2 R112.2 R118.2 R121.2 R127.1 R128.1 R129.1 R142.2 R149.1 R151.1 R160.1 R164.1 R165.1 R166.1 R168.1 R170.1 R174.1 R175.1 R176.2 R181.2 R183.1 R186.1 R187.2 R190.2 R211.2 R212.2 R229.1 R240.2 R241.2 R245.1 R248.1 R249.2 R250.1 R253.1 R259.1 R260.1 R263.1 R264.1 R276.1 R301.2 R302.2 R305.1 R306.1 R309.1 R310.1 U17.12 U17.18(VSS_4) U17.31 U17.47 U17.63 U18.11 U19.1 U19.3 U20.11 U22.1 U22.9 U23.1 U23.9 U28.3 U29.3 U30.3 U36.3 U37.3 U38.3 U40.3 U41.3 U42.4 U43.4 U44.3 U45.3 U46.1 U48.3 U50.3 U54.2(S) U55.3 U56.4 U56.9 U57.2 U58.2 U59.2 U60.2 U61.4 U61.9 U62.1 U62.9 U64.3 U68.11 U76.3 U77.3 U78.1 U78.2 U78.5 U78.6 U78.D U79.1 U79.2 U79.5 U79.6 U79.D U80.3 U81.3 U82.3 U83.3 U84.4 U84.S(S#S) U85.1 U85.9 U86.3 U87.3 U90.1 U91.4 Y1.2 Y1.4
VBAT: D55.2 F1.2 R143.2 R148.2 R154.2 U46.3(S2) U51.2(S) U52.2(S)
VBAT_IN: J5.3 J5.4 U43.1
VBAT_PRE: D54.1(CATHODE) F1.1 R147.2 U43.3 U53.2(S)
VBAT_RTN: J5.1 J5.2 U43.2
VDD5: C5.2 C55.2 C56.2 C95.1 C122.2 C142.2 C148.2 C149.2 C153.2 R59.1 R82.2 R167.1 R188.1 R202.1 U18.4 U20.4 U57.5(OUT) U64.1 U68.4
VDD5_DISP: C125.2 J2.3 R169.1 U58.5(OUT)
VDD12: C138.2 D60.1(CATHODE) L7.2 L8.1 L9.1 L10.1 R173.1
VDD12_FAN: C140.2 C176.2 L9.2 U62.5 U85.5
VDD12_LDM: J12.3 U90.5 U90.6
VDD12_MOTOR: C46.1 C47.1 C48.2 C99.2 C102.1 C103.1 C199.2 C200.2 L8.2 R46.1 U22.5 U23.5
VDD33: C39.2 C57.2 C63.2 C64.1 C76.1 C80.2 C92.1 C98.1 C126.2 C166.1 C168.1 C170.1 C172.1 C174.2 C175.2 C178.2 C179.1 C198.1 J2.10 L4.1 Q5.1 R17.2 R18.2 R23.2 R24.2 R26.2 R27.2 R65.2 R66.2 R76.2 R84.2 R126.2 R130.2 R133.2 R185.2 R238.2 R239.2 R242.2 R243.2 R252.2 R274.1 R293.1 U17.19 U17.32 U17.48 U17.64 U19.8(VDD) U28.1 U28.6 U29.1 U29.6 U30.1 U30.6 U36.1 U36.6 U38.1 U38.6 U41.1 U41.6 U42.3(WP#(IO2)) U42.7 U42.8 U59.5(OUT) U76.1 U76.6 U77.1 U77.6 U80.1 U80.6 U81.1 U81.6 U82.6 U83.6 U86.1 U86.6 U87.1 U87.6 U91.8
VDD33_WIFI: C75.1 C78.2 C130.2 J2.1 U37.1 U37.6 U40.1 U40.6 U60.5(OUT)
VDD33A: C81.2 C84.2 L4.2 U17.13
VDD55: C119.2 C120.2 C121.2 C123.2 C124.2 C127.2 C128.2 C131.2 C132.2 D58.1(CATHODE) L6.2 R163.1 U57.1 U57.3 U58.1 U59.1 U59.3 U60.1
ADC01_IN14: R300.2 U17.24 U91.7(OUTB)
ADC01_IN15: R299.2 U17.25 U91.1
ADC012_IN10: C89.2 R104.1 U17.11
ADC012_IN11: C86.2 R97.1 U17.10
ADC012_IN12: C96.2 R123.1 U17.9
ADC012_IN13: C94.2 R116.1 U17.8
ADC-PT100: R89.1 R230.2 U18.1
ADC-TEST: R114.1 R246.2 U68.7
ADC-VR1: R90.2 R224.1 U18.14(OUTD)
ADC-VR2: R115.2 R226.1 U18.8
ADC_RDY: R17.1 U17.45 U19.2
BOOT0: R126.1 R127.2 U17.60
BOOT1: R76.1 R77.2 U17.28
DAC_OUT0: R132.2 U17.20
DAC_OUT1: R131.2 U17.21
I2C0_SCL: R27.1 U17.61 U19.10
I2C0_SDA: R26.1 U17.62 U19.9
IO_CON_FLASH: J13.3 R273.2
IO_DAY_NIGHT: J13.2 R286.2
IO_FAN1_OUT1: J10.4 U62.6
IO_FAN1_OUT2: J10.3 U62.8
